# EAGLE board MOSFET_Power_Switch-Panel (EAGLE 9.6.2), part 1 of 2
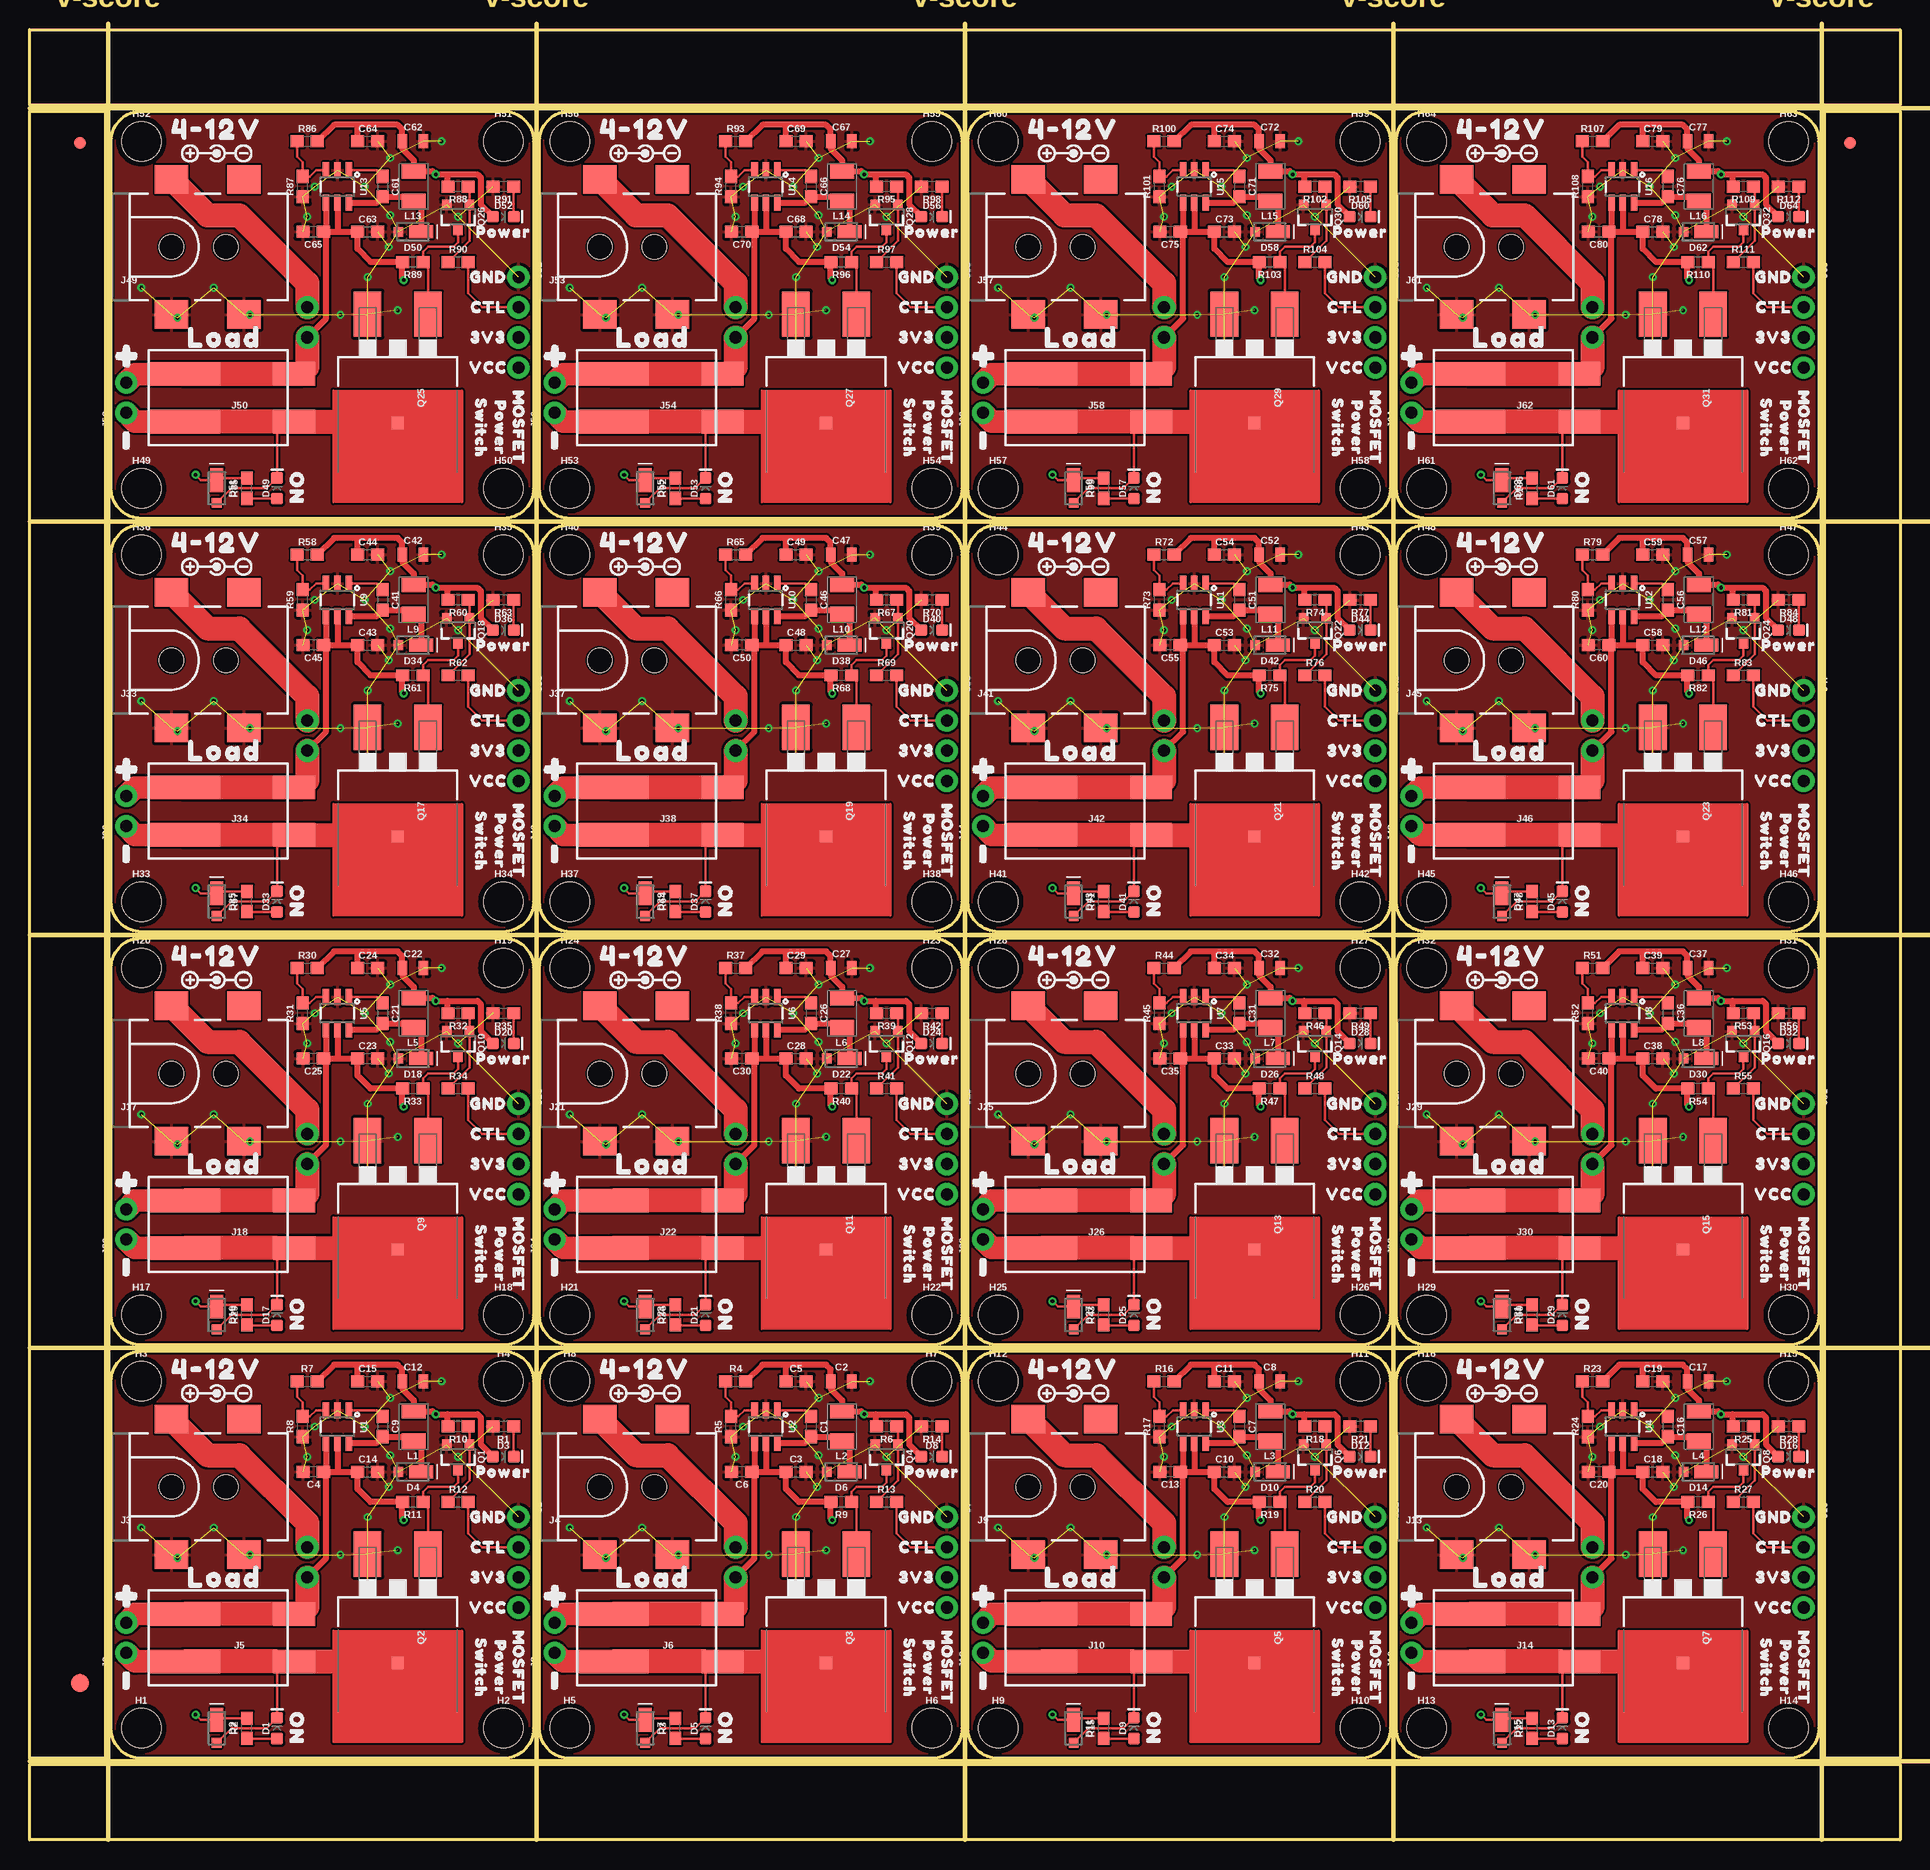
[diagram p0: board, top side]
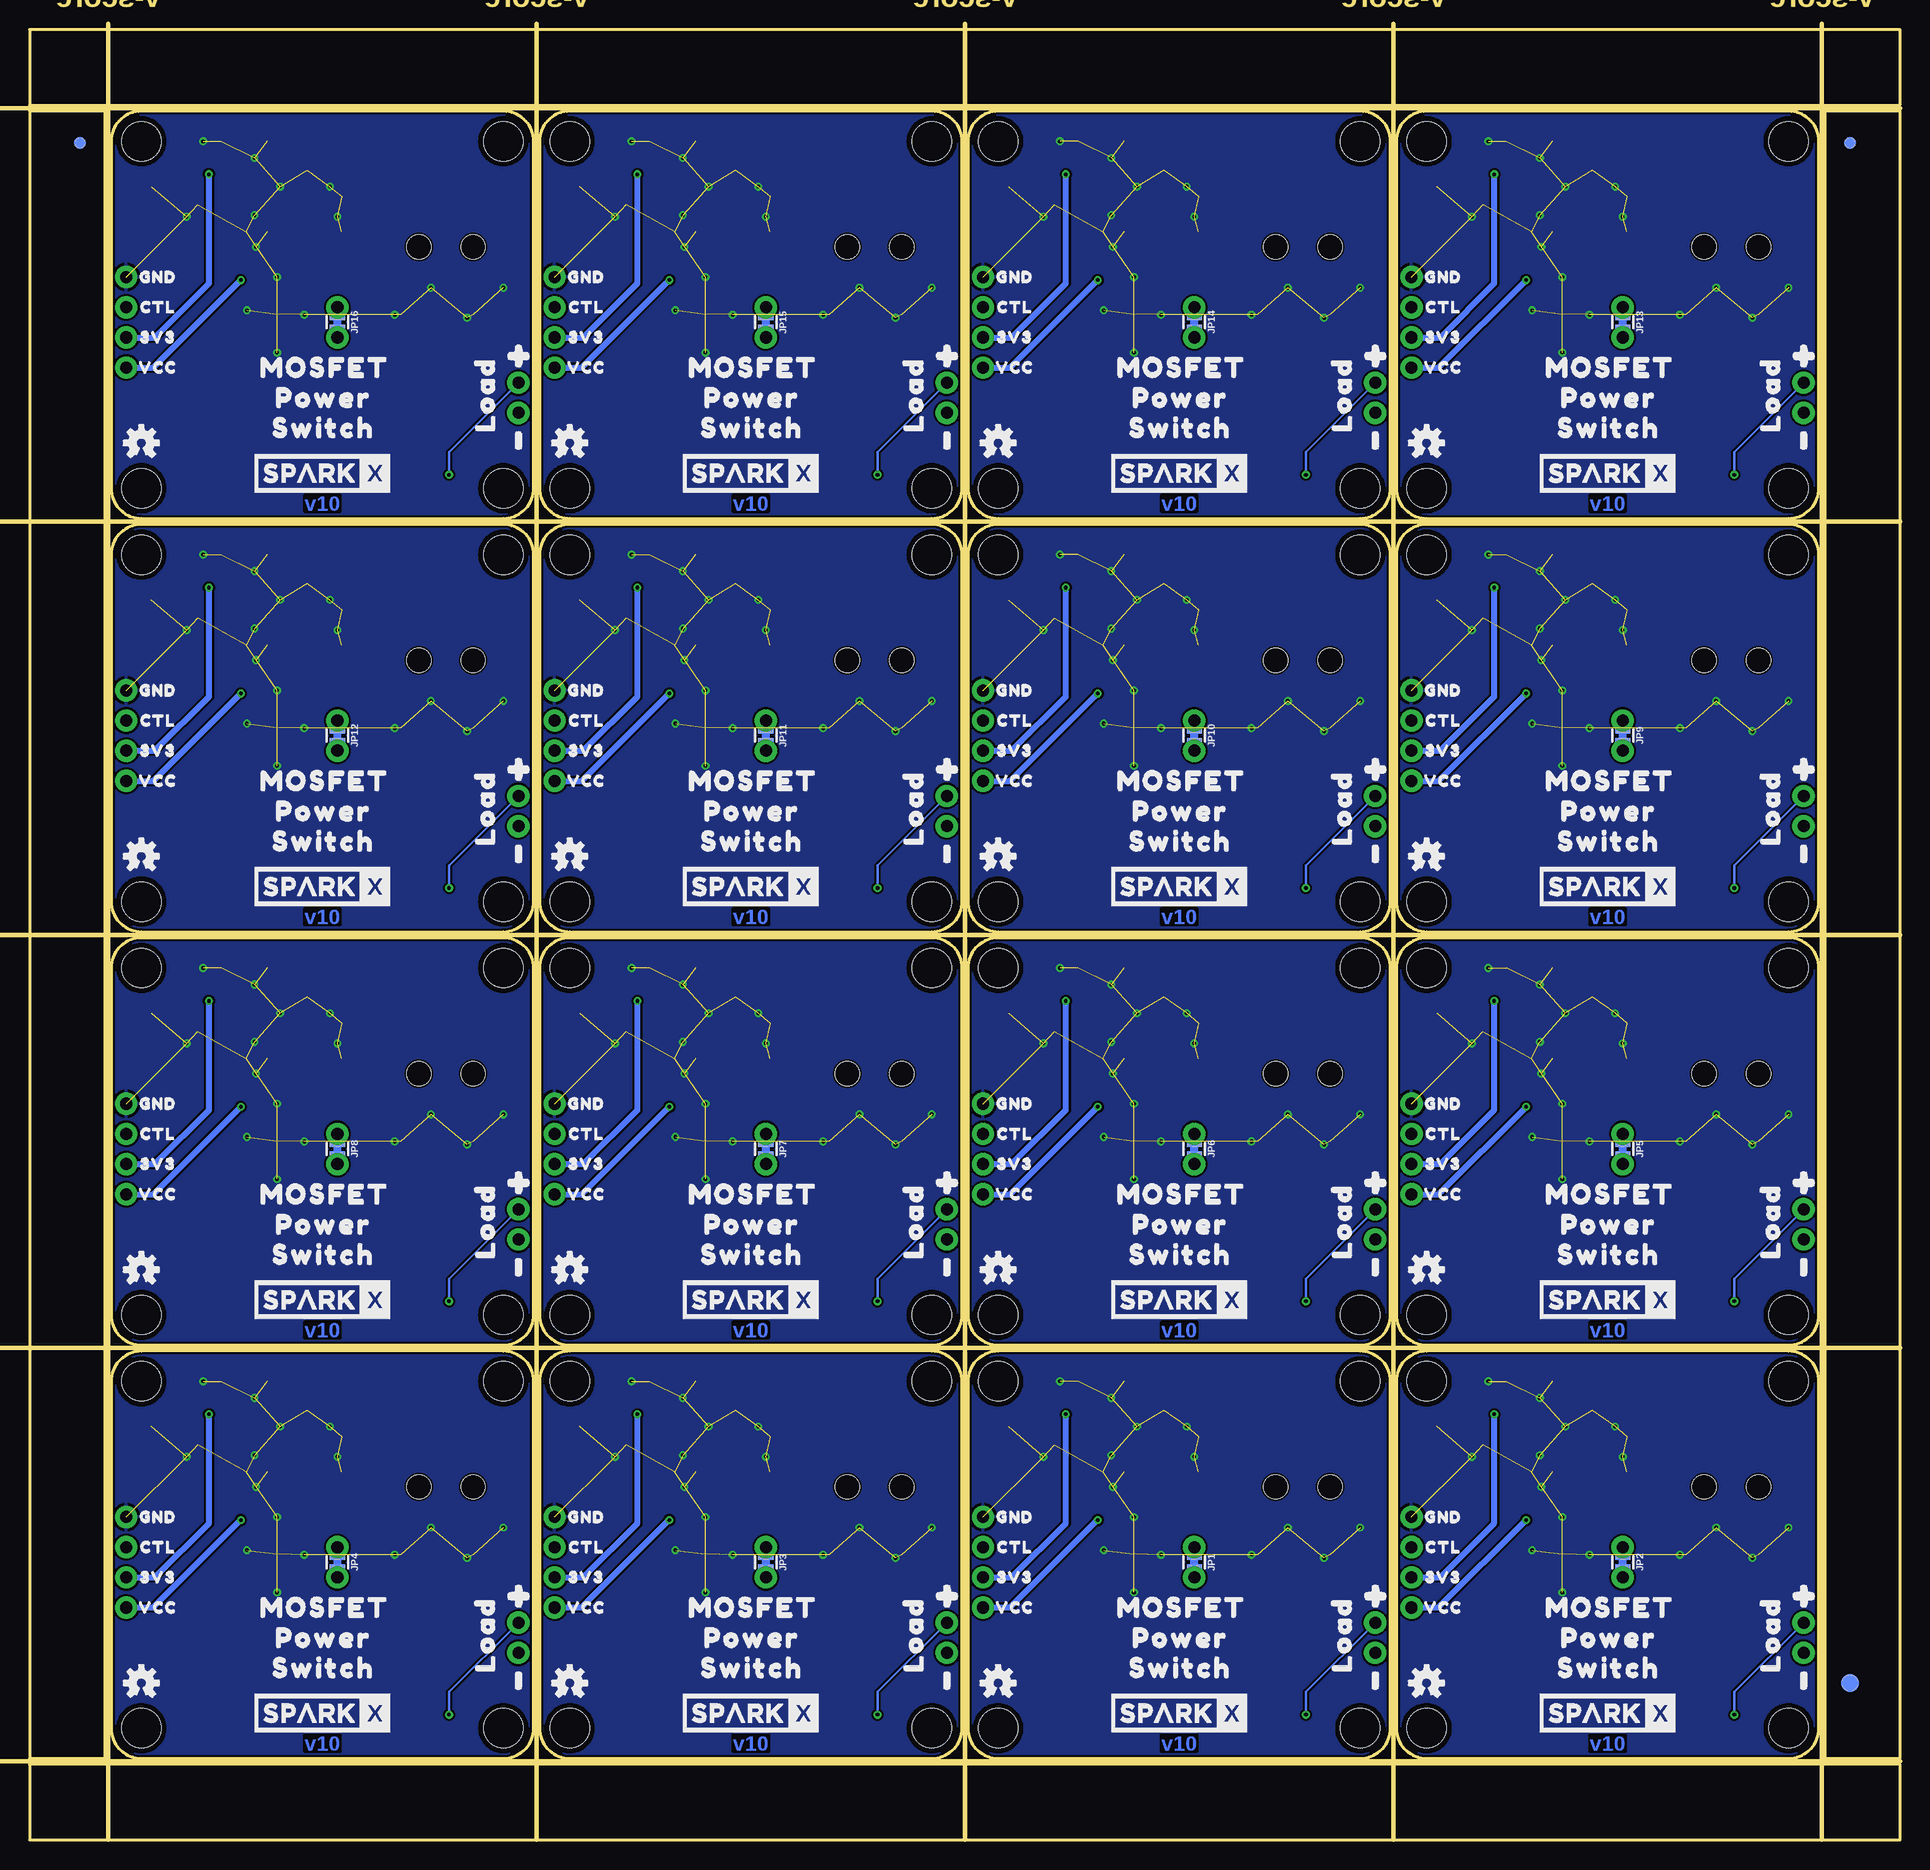
[diagram p1: board, bottom side, seen from below]

Size 157.48 x 152.4 mm. Coordinates in mm from the lower left corner, seen from the top.
Outline: 6.86,9.4 6.86,38.61 arc-90 9.4,41.15 39.88,41.15 arc-90 42.42,38.61 42.42,9.4 arc-90 39.88,6.86 9.4,6.86 arc-90 6.86,9.4
Outline: 42.93,9.4 42.93,38.61 arc-90 45.47,41.15 75.95,41.15 arc-90 78.49,38.61 78.49,9.4 arc-90 75.95,6.86 45.47,6.86 arc-90 42.93,9.4
Outline: 78.99,9.4 78.99,38.61 arc-90 81.53,41.15 112.01,41.15 arc-90 114.55,38.61 114.55,9.4 arc-90 112.01,6.86 81.53,6.86 arc-90 78.99,9.4
Outline: 115.06,9.4 115.06,38.61 arc-90 117.6,41.15 148.08,41.15 arc-90 150.62,38.61 150.62,9.4 arc-90 148.08,6.86 117.6,6.86 arc-90 115.06,9.4
Outline: 6.86,44.2 6.86,73.41 arc-90 9.4,75.95 39.88,75.95 arc-90 42.42,73.41 42.42,44.2 arc-90 39.88,41.66 9.4,41.66 arc-90 6.86,44.2
Outline: 42.93,44.2 42.93,73.41 arc-90 45.47,75.95 75.95,75.95 arc-90 78.49,73.41 78.49,44.2 arc-90 75.95,41.66 45.47,41.66 arc-90 42.93,44.2
Outline: 78.99,44.2 78.99,73.41 arc-90 81.53,75.95 112.01,75.95 arc-90 114.55,73.41 114.55,44.2 arc-90 112.01,41.66 81.53,41.66 arc-90 78.99,44.2
Outline: 115.06,44.2 115.06,73.41 arc-90 117.6,75.95 148.08,75.95 arc-90 150.62,73.41 150.62,44.2 arc-90 148.08,41.66 117.6,41.66 arc-90 115.06,44.2
Outline: 6.86,78.99 6.86,108.2 arc-90 9.4,110.74 39.88,110.74 arc-90 42.42,108.2 42.42,78.99 arc-90 39.88,76.45 9.4,76.45 arc-90 6.86,78.99
Outline: 42.93,78.99 42.93,108.2 arc-90 45.47,110.74 75.95,110.74 arc-90 78.49,108.2 78.49,78.99 arc-90 75.95,76.45 45.47,76.45 arc-90 42.93,78.99
Outline: 78.99,78.99 78.99,108.2 arc-90 81.53,110.74 112.01,110.74 arc-90 114.55,108.2 114.55,78.99 arc-90 112.01,76.45 81.53,76.45 arc-90 78.99,78.99
Outline: 115.06,78.99 115.06,108.2 arc-90 117.6,110.74 148.08,110.74 arc-90 150.62,108.2 150.62,78.99 arc-90 148.08,76.45 117.6,76.45 arc-90 115.06,78.99
Outline: 6.86,113.79 6.86,143 arc-90 9.4,145.54 39.88,145.54 arc-90 42.42,143 42.42,113.79 arc-90 39.88,111.25 9.4,111.25 arc-90 6.86,113.79
Outline: 42.93,113.79 42.93,143 arc-90 45.47,145.54 75.95,145.54 arc-90 78.49,143 78.49,113.79 arc-90 75.95,111.25 45.47,111.25 arc-90 42.93,113.79
Outline: 78.99,113.79 78.99,143 arc-90 81.53,145.54 112.01,145.54 arc-90 114.55,143 114.55,113.79 arc-90 112.01,111.25 81.53,111.25 arc-90 78.99,113.79
Outline: 115.06,113.79 115.06,143 arc-90 117.6,145.54 148.08,145.54 arc-90 150.62,143 150.62,113.79 arc-90 148.08,111.25 117.6,111.25 arc-90 115.06,113.79
Outline: 0,6.35 157.48,6.35 157.48,0 0,0 0,6.35
Outline: 151.13,145.54 157.48,145.54 157.48,6.86 151.13,6.86 151.13,145.54
Outline: 0,152.4 157.48,152.4 157.48,146.05 0,146.05 0,152.4
Outline: 0,145.54 6.35,145.54 6.35,6.86 0,6.86 0,145.54
Copper layers (1*16): Top 0.035mm / dielectric 1.5mm / Bottom 0.035mm
Design rules "MOSFET_Power_Switch": minimum track width 7mil, minimum drill 0.3mm, track to track 7mil, track to pad 7mil, pad to pad 7mil, via to via 7mil, smd to smd 7mil, copper to edge 7mil, drill to drill 7mil, minimum pad ring 7mil, minimum via ring 7mil, stop-mask expansion 3mil, vias tented up to drill 25mil, thermal gap 10mil
Net classes: 1 power: width 0.254 mm
Milling: 10 lines

## Footprints (pad centres in the part's own frame; a part is rotated, then mirrored left to right if it is on the bottom)
0603 = smd 1.1 x 1: 1 -0.85,0; 2 0.85,0
0805 = smd 0.8 x 1.2: 1 -0.9,0; 2 0.9,0
LED-0603 = smd 1 x 1: A -0.877,0; C 0.877,0
DIODE-MICRO-SMP = smd 0.813 x 0.813: A 1.219,0 | smd 2.007 x 1.102: C -0.699,0
FIDUCIAL-1X2 = smd 1 x 1: 1 0,0
FIDUCIAL-1.5X3 = smd 1.5 x 1.5: 1 0,0
STAND-OFF = hole 3.302: 0,0
1X04_NO_SILK = drill 1.016 pad 1.88: 1 0,0; 2 2.54,0; 3 5.08,0; 4 7.62,0
1X02_NO_SILK = drill 1.016 pad 1.88: 1 0,0; 2 2.54,0
POWER_JACK_SMD = smd 2.8 x 2.4: GND 0,-5.7; P$4 6.1,-5.7; VIN0 0,5.7; VIN1 6.1,5.7 | hole 2.032: 0,0; 4.572,0
1X02_POKEHOME = smd 3.5 x 2: P1 5.25,2; P2 5.25,-2 | smd 6 x 2: P3 -4,2; P4 -4,-2
COMBO-JUMPER_2_NC_TRACE = smd 0.635 x 1.27: 1 -0.508,0; 2 0.508,0 | drill 1.016 pad 1.88: 3 -1.27,0; 4 1.27,0
INDUCTOR_LQH32 = smd 2 x 1.25: P$1 -0.07,1.205; P$2 -0.07,-1.295
SOT23-3 = smd 0.8 x 0.9: 1 -0.95,-1; 2 0.95,-1; 3 0,1.1
TO-263/D2PAK = smd 2.32 x 3.81: 1 -2.54,-7.045; 3 2.54,-7.045 | smd 1 x 1: 2 0,2.125
SOT23-6 = smd 0.55 x 1.35: 1 -0.95,-1.375; 2 0,-1.375; 3 0.95,-1.375; 4 0.95,1.375; 5 0,1.375; 6 -0.95,1.375

## Placement (x,y rotation side)
C1  470nF  [0603]  65.79,34.8 270 top
C2  47uF/6.3V  [0805]  68.33,38.61 0 top
C3  0.1uF  [0603]  64.52,30.99 0 top
C4  4.7uF  [0603]  23.88,30.99 180 top
C5  0.1uF  [0603]  64.52,38.61 0 top
C6  4.7uF  [0603]  59.94,30.99 180 top
C7  470nF  [0603]  101.85,34.8 270 top
C8  47uF/6.3V  [0805]  104.39,38.61 0 top
C9  470nF  [0603]  29.72,34.8 270 top
C10  0.1uF  [0603]  100.58,30.99 0 top
C11  0.1uF  [0603]  100.58,38.61 0 top
C12  47uF/6.3V  [0805]  32.26,38.61 0 top
C13  4.7uF  [0603]  96.01,30.99 180 top
C14  0.1uF  [0603]  28.45,30.99 0 top
C15  0.1uF  [0603]  28.45,38.61 0 top
C16  470nF  [0603]  137.92,34.8 270 top
C17  47uF/6.3V  [0805]  140.46,38.61 0 top
C18  0.1uF  [0603]  136.65,30.99 0 top
C19  0.1uF  [0603]  136.65,38.61 0 top
C20  4.7uF  [0603]  132.08,30.99 180 top
C21  470nF  [0603]  29.72,69.6 270 top
C22  47uF/6.3V  [0805]  32.26,73.41 0 top
C23  0.1uF  [0603]  28.45,65.79 0 top
C24  0.1uF  [0603]  28.45,73.41 0 top
C25  4.7uF  [0603]  23.88,65.79 180 top
C26  470nF  [0603]  65.79,69.6 270 top
C27  47uF/6.3V  [0805]  68.33,73.41 0 top
C28  0.1uF  [0603]  64.52,65.79 0 top
C29  0.1uF  [0603]  64.52,73.41 0 top
C30  4.7uF  [0603]  59.94,65.79 180 top
C31  470nF  [0603]  101.85,69.6 270 top
C32  47uF/6.3V  [0805]  104.39,73.41 0 top
C33  0.1uF  [0603]  100.58,65.79 0 top
C34  0.1uF  [0603]  100.58,73.41 0 top
C35  4.7uF  [0603]  96.01,65.79 180 top
C36  470nF  [0603]  137.92,69.6 270 top
C37  47uF/6.3V  [0805]  140.46,73.41 0 top
C38  0.1uF  [0603]  136.65,65.79 0 top
C39  0.1uF  [0603]  136.65,73.41 0 top
C40  4.7uF  [0603]  132.08,65.79 180 top
C41  470nF  [0603]  29.72,104.39 270 top
C42  47uF/6.3V  [0805]  32.26,108.2 0 top
C43  0.1uF  [0603]  28.45,100.58 0 top
C44  0.1uF  [0603]  28.45,108.2 0 top
C45  4.7uF  [0603]  23.88,100.58 180 top
C46  470nF  [0603]  65.79,104.39 270 top
C47  47uF/6.3V  [0805]  68.33,108.2 0 top
C48  0.1uF  [0603]  64.52,100.58 0 top
C49  0.1uF  [0603]  64.52,108.2 0 top
C50  4.7uF  [0603]  59.94,100.58 180 top
C51  470nF  [0603]  101.85,104.39 270 top
C52  47uF/6.3V  [0805]  104.39,108.2 0 top
C53  0.1uF  [0603]  100.58,100.58 0 top
C54  0.1uF  [0603]  100.58,108.2 0 top
C55  4.7uF  [0603]  96.01,100.58 180 top
C56  470nF  [0603]  137.92,104.39 270 top
C57  47uF/6.3V  [0805]  140.46,108.2 0 top
C58  0.1uF  [0603]  136.65,100.58 0 top
C59  0.1uF  [0603]  136.65,108.2 0 top
C60  4.7uF  [0603]  132.08,100.58 180 top
C61  470nF  [0603]  29.72,139.19 270 top
C62  47uF/6.3V  [0805]  32.26,143 0 top
C63  0.1uF  [0603]  28.45,135.38 0 top
C64  0.1uF  [0603]  28.45,143 0 top
C65  4.7uF  [0603]  23.88,135.38 180 top
C66  470nF  [0603]  65.79,139.19 270 top
C67  47uF/6.3V  [0805]  68.33,143 0 top
C68  0.1uF  [0603]  64.52,135.38 0 top
C69  0.1uF  [0603]  64.52,143 0 top
C70  4.7uF  [0603]  59.94,135.38 180 top
C71  470nF  [0603]  101.85,139.19 270 top
C72  47uF/6.3V  [0805]  104.39,143 0 top
C73  0.1uF  [0603]  100.58,135.38 0 top
C74  0.1uF  [0603]  100.58,143 0 top
C75  4.7uF  [0603]  96.01,135.38 180 top
C76  470nF  [0603]  137.92,139.19 270 top
C77  47uF/6.3V  [0805]  140.46,143 0 top
C78  0.1uF  [0603]  136.65,135.38 0 top
C79  0.1uF  [0603]  136.65,143 0 top
C80  4.7uF  [0603]  132.08,135.38 180 top
D1  RED  [LED-0603]  20.83,9.4 90 top
D2  1A/60V/520mV  [DIODE-MICRO-SMP]  15.75,9.4 270 top
D3  RED  [LED-0603]  39.88,32.26 0 top
D4  1A/60V/520mV  [DIODE-MICRO-SMP]  32.26,30.99 180 top
D5  RED  [LED-0603]  56.9,9.4 90 top
D6  1A/60V/520mV  [DIODE-MICRO-SMP]  68.33,30.99 180 top
D7  1A/60V/520mV  [DIODE-MICRO-SMP]  51.82,9.4 270 top
D8  RED  [LED-0603]  75.95,32.26 0 top
D9  RED  [LED-0603]  92.96,9.4 90 top
D10  1A/60V/520mV  [DIODE-MICRO-SMP]  104.39,30.99 180 top
D11  1A/60V/520mV  [DIODE-MICRO-SMP]  87.88,9.4 270 top
D12  RED  [LED-0603]  112.01,32.26 0 top
D13  RED  [LED-0603]  129.03,9.4 90 top
D14  1A/60V/520mV  [DIODE-MICRO-SMP]  140.46,30.99 180 top
D15  1A/60V/520mV  [DIODE-MICRO-SMP]  123.95,9.4 270 top
D16  RED  [LED-0603]  148.08,32.26 0 top
D17  RED  [LED-0603]  20.83,44.2 90 top
D18  1A/60V/520mV  [DIODE-MICRO-SMP]  32.26,65.79 180 top
D19  1A/60V/520mV  [DIODE-MICRO-SMP]  15.75,44.2 270 top
D20  RED  [LED-0603]  39.88,67.06 0 top
D21  RED  [LED-0603]  56.9,44.2 90 top
D22  1A/60V/520mV  [DIODE-MICRO-SMP]  68.33,65.79 180 top
D23  1A/60V/520mV  [DIODE-MICRO-SMP]  51.82,44.2 270 top
D24  RED  [LED-0603]  75.95,67.06 0 top
D25  RED  [LED-0603]  92.96,44.2 90 top
D26  1A/60V/520mV  [DIODE-MICRO-SMP]  104.39,65.79 180 top
D27  1A/60V/520mV  [DIODE-MICRO-SMP]  87.88,44.2 270 top
D28  RED  [LED-0603]  112.01,67.06 0 top
D29  RED  [LED-0603]  129.03,44.2 90 top
D30  1A/60V/520mV  [DIODE-MICRO-SMP]  140.46,65.79 180 top
D31  1A/60V/520mV  [DIODE-MICRO-SMP]  123.95,44.2 270 top
D32  RED  [LED-0603]  148.08,67.06 0 top
D33  RED  [LED-0603]  20.83,78.99 90 top
D34  1A/60V/520mV  [DIODE-MICRO-SMP]  32.26,100.58 180 top
D35  1A/60V/520mV  [DIODE-MICRO-SMP]  15.75,78.99 270 top
D36  RED  [LED-0603]  39.88,101.85 0 top
D37  RED  [LED-0603]  56.9,78.99 90 top
D38  1A/60V/520mV  [DIODE-MICRO-SMP]  68.33,100.58 180 top
D39  1A/60V/520mV  [DIODE-MICRO-SMP]  51.82,78.99 270 top
D40  RED  [LED-0603]  75.95,101.85 0 top
D41  RED  [LED-0603]  92.96,78.99 90 top
D42  1A/60V/520mV  [DIODE-MICRO-SMP]  104.39,100.58 180 top
D43  1A/60V/520mV  [DIODE-MICRO-SMP]  87.88,78.99 270 top
D44  RED  [LED-0603]  112.01,101.85 0 top
D45  RED  [LED-0603]  129.03,78.99 90 top
D46  1A/60V/520mV  [DIODE-MICRO-SMP]  140.46,100.58 180 top
D47  1A/60V/520mV  [DIODE-MICRO-SMP]  123.95,78.99 270 top
D48  RED  [LED-0603]  148.08,101.85 0 top
D49  RED  [LED-0603]  20.83,113.79 90 top
D50  1A/60V/520mV  [DIODE-MICRO-SMP]  32.26,135.38 180 top
D51  1A/60V/520mV  [DIODE-MICRO-SMP]  15.75,113.79 270 top
D52  RED  [LED-0603]  39.88,136.65 0 top
D53  RED  [LED-0603]  56.9,113.79 90 top
D54  1A/60V/520mV  [DIODE-MICRO-SMP]  68.33,135.38 180 top
D55  1A/60V/520mV  [DIODE-MICRO-SMP]  51.82,113.79 270 top
D56  RED  [LED-0603]  75.95,136.65 0 top
D57  RED  [LED-0603]  92.96,113.79 90 top
D58  1A/60V/520mV  [DIODE-MICRO-SMP]  104.39,135.38 180 top
D59  1A/60V/520mV  [DIODE-MICRO-SMP]  87.88,113.79 270 top
D60  RED  [LED-0603]  112.01,136.65 0 top
D61  RED  [LED-0603]  129.03,113.79 90 top
D62  1A/60V/520mV  [DIODE-MICRO-SMP]  140.46,135.38 180 top
D63  1A/60V/520mV  [DIODE-MICRO-SMP]  123.95,113.79 270 top
D64  RED  [LED-0603]  148.08,136.65 0 top
E$1  [FIDUCIAL-1X2]  4.23,142.88 0 top
E$2  [FIDUCIAL-1X2]  4.23,142.88 0 bottom
E$3  [FIDUCIAL-1X2]  153.25,142.88 0 top
E$4  [FIDUCIAL-1X2]  153.25,142.88 0 bottom
E$5  [FIDUCIAL-1.5X3]  4.23,13.21 0 top
E$6  [FIDUCIAL-1.5X3]  4.23,13.21 0 bottom
H1  STAND-OFF  [STAND-OFF]  9.4,9.4 0 top
H2  STAND-OFF  [STAND-OFF]  39.88,9.4 0 top
H3  STAND-OFF  [STAND-OFF]  9.4,38.61 0 top
H4  STAND-OFF  [STAND-OFF]  39.88,38.61 0 top
H5  STAND-OFF  [STAND-OFF]  45.47,9.4 0 top
H6  STAND-OFF  [STAND-OFF]  75.95,9.4 0 top
H7  STAND-OFF  [STAND-OFF]  75.95,38.61 0 top
H8  STAND-OFF  [STAND-OFF]  45.47,38.61 0 top
H9  STAND-OFF  [STAND-OFF]  81.53,9.4 0 top
H10  STAND-OFF  [STAND-OFF]  112.01,9.4 0 top
H11  STAND-OFF  [STAND-OFF]  112.01,38.61 0 top
H12  STAND-OFF  [STAND-OFF]  81.53,38.61 0 top
H13  STAND-OFF  [STAND-OFF]  117.6,9.4 0 top
H14  STAND-OFF  [STAND-OFF]  148.08,9.4 0 top
H15  STAND-OFF  [STAND-OFF]  148.08,38.61 0 top
H16  STAND-OFF  [STAND-OFF]  117.6,38.61 0 top
H17  STAND-OFF  [STAND-OFF]  9.4,44.2 0 top
H18  STAND-OFF  [STAND-OFF]  39.88,44.2 0 top
H19  STAND-OFF  [STAND-OFF]  39.88,73.41 0 top
H20  STAND-OFF  [STAND-OFF]  9.4,73.41 0 top
H21  STAND-OFF  [STAND-OFF]  45.47,44.2 0 top
H22  STAND-OFF  [STAND-OFF]  75.95,44.2 0 top
H23  STAND-OFF  [STAND-OFF]  75.95,73.41 0 top
H24  STAND-OFF  [STAND-OFF]  45.47,73.41 0 top
H25  STAND-OFF  [STAND-OFF]  81.53,44.2 0 top
H26  STAND-OFF  [STAND-OFF]  112.01,44.2 0 top
H27  STAND-OFF  [STAND-OFF]  112.01,73.41 0 top
H28  STAND-OFF  [STAND-OFF]  81.53,73.41 0 top
H29  STAND-OFF  [STAND-OFF]  117.6,44.2 0 top
H30  STAND-OFF  [STAND-OFF]  148.08,44.2 0 top
H31  STAND-OFF  [STAND-OFF]  148.08,73.41 0 top
H32  STAND-OFF  [STAND-OFF]  117.6,73.41 0 top
H33  STAND-OFF  [STAND-OFF]  9.4,78.99 0 top
H34  STAND-OFF  [STAND-OFF]  39.88,78.99 0 top
H35  STAND-OFF  [STAND-OFF]  39.88,108.2 0 top
H36  STAND-OFF  [STAND-OFF]  9.4,108.2 0 top
H37  STAND-OFF  [STAND-OFF]  45.47,78.99 0 top
H38  STAND-OFF  [STAND-OFF]  75.95,78.99 0 top
H39  STAND-OFF  [STAND-OFF]  75.95,108.2 0 top
H40  STAND-OFF  [STAND-OFF]  45.47,108.2 0 top
H41  STAND-OFF  [STAND-OFF]  81.53,78.99 0 top
H42  STAND-OFF  [STAND-OFF]  112.01,78.99 0 top
H43  STAND-OFF  [STAND-OFF]  112.01,108.2 0 top
H44  STAND-OFF  [STAND-OFF]  81.53,108.2 0 top
H45  STAND-OFF  [STAND-OFF]  117.6,78.99 0 top
H46  STAND-OFF  [STAND-OFF]  148.08,78.99 0 top
H47  STAND-OFF  [STAND-OFF]  148.08,108.2 0 top
H48  STAND-OFF  [STAND-OFF]  117.6,108.2 0 top
H49  STAND-OFF  [STAND-OFF]  9.4,113.79 0 top
H50  STAND-OFF  [STAND-OFF]  39.88,113.79 0 top
H51  STAND-OFF  [STAND-OFF]  39.88,143 0 top
H52  STAND-OFF  [STAND-OFF]  9.4,143 0 top
H53  STAND-OFF  [STAND-OFF]  45.47,113.79 0 top
H54  STAND-OFF  [STAND-OFF]  75.95,113.79 0 top
H55  STAND-OFF  [STAND-OFF]  75.95,143 0 top
H56  STAND-OFF  [STAND-OFF]  45.47,143 0 top
H57  STAND-OFF  [STAND-OFF]  81.53,113.79 0 top
H58  STAND-OFF  [STAND-OFF]  112.01,113.79 0 top
H59  STAND-OFF  [STAND-OFF]  112.01,143 0 top
H60  STAND-OFF  [STAND-OFF]  81.53,143 0 top
H61  STAND-OFF  [STAND-OFF]  117.6,113.79 0 top
H62  STAND-OFF  [STAND-OFF]  148.08,113.79 0 top
H63  STAND-OFF  [STAND-OFF]  148.08,143 0 top
H64  STAND-OFF  [STAND-OFF]  117.6,143 0 top
J1  [1X04_NO_SILK]  41.15,27.18 270 top
J2  [1X02_NO_SILK]  8.13,15.75 90 top
J3  5.5x2.1mm Barrel  [POWER_JACK_SMD]  11.94,29.72 0 top
J4  5.5x2.1mm Barrel  [POWER_JACK_SMD]  48.01,29.72 0 top
J5  [1X02_POKEHOME]  17.02,17.02 0 top
J6  [1X02_POKEHOME]  53.09,17.02 0 top
J7  [1X04_NO_SILK]  77.22,27.18 270 top
J8  [1X02_NO_SILK]  44.2,15.75 90 top
J9  5.5x2.1mm Barrel  [POWER_JACK_SMD]  84.07,29.72 0 top
J10  [1X02_POKEHOME]  89.15,17.02 0 top
J11  [1X04_NO_SILK]  113.28,27.18 270 top
J12  [1X02_NO_SILK]  80.26,15.75 90 top
J13  5.5x2.1mm Barrel  [POWER_JACK_SMD]  120.14,29.72 0 top
J14  [1X02_POKEHOME]  125.22,17.02 0 top
J15  [1X04_NO_SILK]  149.35,27.18 270 top
J16  [1X02_NO_SILK]  116.33,15.75 90 top
J17  5.5x2.1mm Barrel  [POWER_JACK_SMD]  11.94,64.52 0 top
J18  [1X02_POKEHOME]  17.02,51.82 0 top
J19  [1X04_NO_SILK]  41.15,61.98 270 top
J20  [1X02_NO_SILK]  8.13,50.55 90 top
J21  5.5x2.1mm Barrel  [POWER_JACK_SMD]  48.01,64.52 0 top
J22  [1X02_POKEHOME]  53.09,51.82 0 top
J23  [1X04_NO_SILK]  77.22,61.98 270 top
J24  [1X02_NO_SILK]  44.2,50.55 90 top
J25  5.5x2.1mm Barrel  [POWER_JACK_SMD]  84.07,64.52 0 top
J26  [1X02_POKEHOME]  89.15,51.82 0 top
J27  [1X04_NO_SILK]  113.28,61.98 270 top
J28  [1X02_NO_SILK]  80.26,50.55 90 top
J29  5.5x2.1mm Barrel  [POWER_JACK_SMD]  120.14,64.52 0 top
J30  [1X02_POKEHOME]  125.22,51.82 0 top
J31  [1X04_NO_SILK]  149.35,61.98 270 top
J32  [1X02_NO_SILK]  116.33,50.55 90 top
J33  5.5x2.1mm Barrel  [POWER_JACK_SMD]  11.94,99.31 0 top
J34  [1X02_POKEHOME]  17.02,86.61 0 top
J35  [1X04_NO_SILK]  41.15,96.77 270 top
J36  [1X02_NO_SILK]  8.13,85.34 90 top
J37  5.5x2.1mm Barrel  [POWER_JACK_SMD]  48.01,99.31 0 top
J38  [1X02_POKEHOME]  53.09,86.61 0 top
J39  [1X04_NO_SILK]  77.22,96.77 270 top
J40  [1X02_NO_SILK]  44.2,85.34 90 top
J41  5.5x2.1mm Barrel  [POWER_JACK_SMD]  84.07,99.31 0 top
J42  [1X02_POKEHOME]  89.15,86.61 0 top
J43  [1X04_NO_SILK]  113.28,96.77 270 top
J44  [1X02_NO_SILK]  80.26,85.34 90 top
J45  5.5x2.1mm Barrel  [POWER_JACK_SMD]  120.14,99.31 0 top
J46  [1X02_POKEHOME]  125.22,86.61 0 top
J47  [1X04_NO_SILK]  149.35,96.77 270 top
J48  [1X02_NO_SILK]  116.33,85.34 90 top
J49  5.5x2.1mm Barrel  [POWER_JACK_SMD]  11.94,134.11 0 top
J50  [1X02_POKEHOME]  17.02,121.41 0 top
J51  [1X04_NO_SILK]  41.15,131.57 270 top
J52  [1X02_NO_SILK]  8.13,120.14 90 top
J53  5.5x2.1mm Barrel  [POWER_JACK_SMD]  48.01,134.11 0 top
J54  [1X02_POKEHOME]  53.09,121.41 0 top
J55  [1X04_NO_SILK]  77.22,131.57 270 top
J56  [1X02_NO_SILK]  44.2,120.14 90 top
J57  5.5x2.1mm Barrel  [POWER_JACK_SMD]  84.07,134.11 0 top
J58  [1X02_POKEHOME]  89.15,121.41 0 top
J59  [1X04_NO_SILK]  113.28,131.57 270 top
J60  [1X02_NO_SILK]  80.26,120.14 90 top
J61  5.5x2.1mm Barrel  [POWER_JACK_SMD]  120.14,134.11 0 top
J62  [1X02_POKEHOME]  125.22,121.41 0 top
J63  [1X04_NO_SILK]  149.35,131.57 270 top
J64  [1X02_NO_SILK]  116.33,120.14 90 top
JP1  JUMPER-COMBO_2_NC_TRACE  [COMBO-JUMPER_2_NC_TRACE]  59.44,23.37 270 bottom
JP2  JUMPER-COMBO_2_NC_TRACE  [COMBO-JUMPER_2_NC_TRACE]  23.37,23.37 270 bottom
JP3  JUMPER-COMBO_2_NC_TRACE  [COMBO-JUMPER_2_NC_TRACE]  95.5,23.37 270 bottom
JP4  JUMPER-COMBO_2_NC_TRACE  [COMBO-JUMPER_2_NC_TRACE]  131.57,23.37 270 bottom
JP5  JUMPER-COMBO_2_NC_TRACE  [COMBO-JUMPER_2_NC_TRACE]  23.37,58.17 270 bottom
JP6  JUMPER-COMBO_2_NC_TRACE  [COMBO-JUMPER_2_NC_TRACE]  59.44,58.17 270 bottom
JP7  JUMPER-COMBO_2_NC_TRACE  [COMBO-JUMPER_2_NC_TRACE]  95.5,58.17 270 bottom
JP8  JUMPER-COMBO_2_NC_TRACE  [COMBO-JUMPER_2_NC_TRACE]  131.57,58.17 270 bottom
JP9  JUMPER-COMBO_2_NC_TRACE  [COMBO-JUMPER_2_NC_TRACE]  23.37,92.96 270 bottom
JP10  JUMPER-COMBO_2_NC_TRACE  [COMBO-JUMPER_2_NC_TRACE]  59.44,92.96 270 bottom
JP11  JUMPER-COMBO_2_NC_TRACE  [COMBO-JUMPER_2_NC_TRACE]  95.5,92.96 270 bottom
JP12  JUMPER-COMBO_2_NC_TRACE  [COMBO-JUMPER_2_NC_TRACE]  131.57,92.96 270 bottom
JP13  JUMPER-COMBO_2_NC_TRACE  [COMBO-JUMPER_2_NC_TRACE]  23.37,127.76 270 bottom
JP14  JUMPER-COMBO_2_NC_TRACE  [COMBO-JUMPER_2_NC_TRACE]  59.44,127.76 270 bottom
JP15  JUMPER-COMBO_2_NC_TRACE  [COMBO-JUMPER_2_NC_TRACE]  95.5,127.76 270 bottom
JP16  JUMPER-COMBO_2_NC_TRACE  [COMBO-JUMPER_2_NC_TRACE]  131.57,127.76 270 bottom
L1  15uH  [INDUCTOR_LQH32]  32.26,34.8 180 top
L2  15uH  [INDUCTOR_LQH32]  68.33,34.8 180 top
L3  15uH  [INDUCTOR_LQH32]  104.39,34.8 180 top
L4  15uH  [INDUCTOR_LQH32]  140.46,34.8 180 top
L5  15uH  [INDUCTOR_LQH32]  32.26,69.6 180 top
L6  15uH  [INDUCTOR_LQH32]  68.33,69.6 180 top
L7  15uH  [INDUCTOR_LQH32]  104.39,69.6 180 top
L8  15uH  [INDUCTOR_LQH32]  140.46,69.6 180 top
L9  15uH  [INDUCTOR_LQH32]  32.26,104.39 180 top
L10  15uH  [INDUCTOR_LQH32]  68.33,104.39 180 top
L11  15uH  [INDUCTOR_LQH32]  104.39,104.39 180 top
L12  15uH  [INDUCTOR_LQH32]  140.46,104.39 180 top
L13  15uH  [INDUCTOR_LQH32]  32.26,139.19 180 top
L14  15uH  [INDUCTOR_LQH32]  68.33,139.19 180 top
L15  15uH  [INDUCTOR_LQH32]  104.39,139.19 180 top
L16  15uH  [INDUCTOR_LQH32]  140.46,139.19 180 top
LOGO1  OSHW-LOGOS  [OSHW-LOGO-S]  39.88,13.21 0 bottom
LOGO2  OSHW-LOGOS  [OSHW-LOGO-S]  75.95,13.21 0 bottom
LOGO3  OSHW-LOGOS  [OSHW-LOGO-S]  112.01,13.21 0 bottom
LOGO4  OSHW-LOGOS  [OSHW-LOGO-S]  148.08,13.21 0 bottom
LOGO5  OSHW-LOGOS  [OSHW-LOGO-S]  39.88,48.01 0 bottom
LOGO6  OSHW-LOGOS  [OSHW-LOGO-S]  75.95,48.01 0 bottom
LOGO7  OSHW-LOGOS  [OSHW-LOGO-S]  112.01,48.01 0 bottom
LOGO8  OSHW-LOGOS  [OSHW-LOGO-S]  148.08,48.01 0 bottom
LOGO9  OSHW-LOGOS  [OSHW-LOGO-S]  39.88,82.8 0 bottom
LOGO10  OSHW-LOGOS  [OSHW-LOGO-S]  75.95,82.8 0 bottom
LOGO11  OSHW-LOGOS  [OSHW-LOGO-S]  112.01,82.8 0 bottom
LOGO12  OSHW-LOGOS  [OSHW-LOGO-S]  148.08,82.8 0 bottom
LOGO13  OSHW-LOGOS  [OSHW-LOGO-S]  39.88,117.6 0 bottom
LOGO14  OSHW-LOGOS  [OSHW-LOGO-S]  75.95,117.6 0 bottom
LOGO15  OSHW-LOGOS  [OSHW-LOGO-S]  112.01,117.6 0 bottom
LOGO16  OSHW-LOGOS  [OSHW-LOGO-S]  148.08,117.6 0 bottom
Q1  600mA/40V  [SOT23-3]  36.07,32.26 180 top
Q2  100A/100V/6.8mΩ  [TO-263/D2PAK]  30.99,17.02 180 top
Q3  100A/100V/6.8mΩ  [TO-263/D2PAK]  67.06,17.02 180 top
Q4  600mA/40V  [SOT23-3]  72.14,32.26 180 top
Q5  100A/100V/6.8mΩ  [TO-263/D2PAK]  103.12,17.02 180 top
Q6  600mA/40V  [SOT23-3]  108.2,32.26 180 top
Q7  100A/100V/6.8mΩ  [TO-263/D2PAK]  139.19,17.02 180 top
Q8  600mA/40V  [SOT23-3]  144.27,32.26 180 top
Q9  100A/100V/6.8mΩ  [TO-263/D2PAK]  30.99,51.82 180 top
Q10  600mA/40V  [SOT23-3]  36.07,67.06 180 top
Q11  100A/100V/6.8mΩ  [TO-263/D2PAK]  67.06,51.82 180 top
Q12  600mA/40V  [SOT23-3]  72.14,67.06 180 top
Q13  100A/100V/6.8mΩ  [TO-263/D2PAK]  103.12,51.82 180 top
Q14  600mA/40V  [SOT23-3]  108.2,67.06 180 top
Q15  100A/100V/6.8mΩ  [TO-263/D2PAK]  139.19,51.82 180 top
Q16  600mA/40V  [SOT23-3]  144.27,67.06 180 top
Q17  100A/100V/6.8mΩ  [TO-263/D2PAK]  30.99,86.61 180 top
Q18  600mA/40V  [SOT23-3]  36.07,101.85 180 top
Q19  100A/100V/6.8mΩ  [TO-263/D2PAK]  67.06,86.61 180 top
Q20  600mA/40V  [SOT23-3]  72.14,101.85 180 top
Q21  100A/100V/6.8mΩ  [TO-263/D2PAK]  103.12,86.61 180 top
Q22  600mA/40V  [SOT23-3]  108.2,101.85 180 top
Q23  100A/100V/6.8mΩ  [TO-263/D2PAK]  139.19,86.61 180 top
Q24  600mA/40V  [SOT23-3]  144.27,101.85 180 top
Q25  100A/100V/6.8mΩ  [TO-263/D2PAK]  30.99,121.41 180 top
Q26  600mA/40V  [SOT23-3]  36.07,136.65 180 top
Q27  100A/100V/6.8mΩ  [TO-263/D2PAK]  67.06,121.41 180 top
Q28  600mA/40V  [SOT23-3]  72.14,136.65 180 top
Q29  100A/100V/6.8mΩ  [TO-263/D2PAK]  103.12,121.41 180 top
Q30  600mA/40V  [SOT23-3]  108.2,136.65 180 top
Q31  100A/100V/6.8mΩ  [TO-263/D2PAK]  139.19,121.41 180 top
Q32  600mA/40V  [SOT23-3]  144.27,136.65 180 top
R1  1k  [0603]  39.88,34.8 180 top
R2  4.7k  [0603]  18.29,9.4 90 top
R3  4.7k  [0603]  54.36,9.4 90 top
R4  3.3k  [0603]  59.44,38.61 0 top
R5  1k  [0603]  59.05,34.8 90 top
R6  10k  [0603]  72.14,34.8 180 top
R7  3.3k  [0603]  23.37,38.61 0 top
R8  1k  [0603]  22.99,34.8 90 top
R9  10k  [0603]  68.33,28.45 180 top
R10  10k  [0603]  36.07,34.8 180 top
R11  10k  [0603]  32.26,28.45 180 top
R12  1k  [0603]  36.07,28.45 0 top
R13  1k  [0603]  72.14,28.45 0 top
R14  1k  [0603]  75.95,34.8 180 top
R15  4.7k  [0603]  90.42,9.4 90 top
R16  3.3k  [0603]  95.5,38.61 0 top
R17  1k  [0603]  95.12,34.8 90 top
R18  10k  [0603]  108.2,34.8 180 top
R19  10k  [0603]  104.39,28.45 180 top
R20  1k  [0603]  108.2,28.45 0 top
R21  1k  [0603]  112.01,34.8 180 top
R22  4.7k  [0603]  126.49,9.4 90 top
R23  3.3k  [0603]  131.57,38.61 0 top
R24  1k  [0603]  131.19,34.8 90 top
R25  10k  [0603]  144.27,34.8 180 top
R26  10k  [0603]  140.46,28.45 180 top
R27  1k  [0603]  144.27,28.45 0 top
R28  1k  [0603]  148.08,34.8 180 top
R29  4.7k  [0603]  18.29,44.2 90 top
R30  3.3k  [0603]  23.37,73.41 0 top
R31  1k  [0603]  22.99,69.6 90 top
R32  10k  [0603]  36.07,69.6 180 top
R33  10k  [0603]  32.26,63.25 180 top
R34  1k  [0603]  36.07,63.25 0 top
R35  1k  [0603]  39.88,69.6 180 top
R36  4.7k  [0603]  54.36,44.2 90 top
R37  3.3k  [0603]  59.44,73.41 0 top
R38  1k  [0603]  59.05,69.6 90 top
R39  10k  [0603]  72.14,69.6 180 top
R40  10k  [0603]  68.33,63.25 180 top
R41  1k  [0603]  72.14,63.25 0 top
R42  1k  [0603]  75.95,69.6 180 top
R43  4.7k  [0603]  90.42,44.2 90 top
R44  3.3k  [0603]  95.5,73.41 0 top
R45  1k  [0603]  95.12,69.6 90 top
R46  10k  [0603]  108.2,69.6 180 top
R47  10k  [0603]  104.39,63.25 180 top
R48  1k  [0603]  108.2,63.25 0 top
R49  1k  [0603]  112.01,69.6 180 top
R50  4.7k  [0603]  126.49,44.2 90 top
R51  3.3k  [0603]  131.57,73.41 0 top
R52  1k  [0603]  131.19,69.6 90 top
R53  10k  [0603]  144.27,69.6 180 top
R54  10k  [0603]  140.46,63.25 180 top
R55  1k  [0603]  144.27,63.25 0 top
R56  1k  [0603]  148.08,69.6 180 top
R57  4.7k  [0603]  18.29,78.99 90 top
R58  3.3k  [0603]  23.37,108.2 0 top
R59  1k  [0603]  22.99,104.39 90 top
R60  10k  [0603]  36.07,104.39 180 top
R61  10k  [0603]  32.26,98.04 180 top
R62  1k  [0603]  36.07,98.04 0 top
R63  1k  [0603]  39.88,104.39 180 top
R64  4.7k  [0603]  54.36,78.99 90 top
R65  3.3k  [0603]  59.44,108.2 0 top
R66  1k  [0603]  59.05,104.39 90 top
R67  10k  [0603]  72.14,104.39 180 top
R68  10k  [0603]  68.33,98.04 180 top
R69  1k  [0603]  72.14,98.04 0 top
R70  1k  [0603]  75.95,104.39 180 top
R71  4.7k  [0603]  90.42,78.99 90 top
R72  3.3k  [0603]  95.5,108.2 0 top
R73  1k  [0603]  95.12,104.39 90 top
R74  10k  [0603]  108.2,104.39 180 top
R75  10k  [0603]  104.39,98.04 180 top
R76  1k  [0603]  108.2,98.04 0 top
R77  1k  [0603]  112.01,104.39 180 top
R78  4.7k  [0603]  126.49,78.99 90 top
R79  3.3k  [0603]  131.57,108.2 0 top
R80  1k  [0603]  131.19,104.39 90 top
R81  10k  [0603]  144.27,104.39 180 top
R82  10k  [0603]  140.46,98.04 180 top
R83  1k  [0603]  144.27,98.04 0 top
R84  1k  [0603]  148.08,104.39 180 top
R85  4.7k  [0603]  18.29,113.79 90 top
R86  3.3k  [0603]  23.37,143 0 top
R87  1k  [0603]  22.99,139.19 90 top
R88  10k  [0603]  36.07,139.19 180 top
R89  10k  [0603]  32.26,132.84 180 top
R90  1k  [0603]  36.07,132.84 0 top
R91  1k  [0603]  39.88,139.19 180 top
R92  4.7k  [0603]  54.36,113.79 90 top
R93  3.3k  [0603]  59.44,143 0 top
R94  1k  [0603]  59.05,139.19 90 top
R95  10k  [0603]  72.14,139.19 180 top
R96  10k  [0603]  68.33,132.84 180 top
R97  1k  [0603]  72.14,132.84 0 top
R98  1k  [0603]  75.95,139.19 180 top
R99  4.7k  [0603]  90.42,113.79 90 top
R100  3.3k  [0603]  95.5,143 0 top
R101  1k  [0603]  95.12,139.19 90 top
R102  10k  [0603]  108.2,139.19 180 top
R103  10k  [0603]  104.39,132.84 180 top
R104  1k  [0603]  108.2,132.84 0 top
R105  1k  [0603]  112.01,139.19 180 top
R106  4.7k  [0603]  126.49,113.79 90 top
R107  3.3k  [0603]  131.57,143 0 top
R108  1k  [0603]  131.19,139.19 90 top
R109  10k  [0603]  144.27,139.19 180 top
R110  10k  [0603]  140.46,132.84 180 top
R111  1k  [0603]  144.27,132.84 0 top
R112  1k  [0603]  148.08,139.19 180 top
U1  LMR14203  [SOT23-6]  25.91,34.8 180 top
U2  LMR14203  [SOT23-6]  61.98,34.8 180 top
U3  LMR14203  [SOT23-6]  98.04,34.8 180 top
U4  LMR14203  [SOT23-6]  134.11,34.8 180 top
U5  LMR14203  [SOT23-6]  25.91,69.6 180 top
U6  LMR14203  [SOT23-6]  61.98,69.6 180 top
U7  LMR14203  [SOT23-6]  98.04,69.6 180 top
U8  LMR14203  [SOT23-6]  134.11,69.6 180 top
U9  LMR14203  [SOT23-6]  25.91,104.39 180 top
U10  LMR14203  [SOT23-6]  61.98,104.39 180 top
U11  LMR14203  [SOT23-6]  98.04,104.39 180 top
U12  LMR14203  [SOT23-6]  134.11,104.39 180 top
U13  LMR14203  [SOT23-6]  25.91,139.19 180 top
U14  LMR14203  [SOT23-6]  61.98,139.19 180 top
U15  LMR14203  [SOT23-6]  98.04,139.19 180 top
U16  LMR14203  [SOT23-6]  134.11,139.19 180 top
U$1  [3V32]  38.61,22.1 0 top
U$2  [MOSFET0]  41.15,14.48 270 top
U$3  [GND0]  38.61,27.18 0 top
U$4  SPARKX-LOGO5  [SPARKX-LARGE]  60.71,10.67 0 bottom
U$5  [LOAD0]  16.38,22.1 0 top
U$6  [4#12V0]  15.75,39.62 0 top
U$7  [VCC3]  38.61,19.56 0 top
U$8  [CTL0]  38.61,24.64 0 top
U$9  [POWER1]  39.62,14.48 270 top
U$10  [#0]  8.13,20.32 270 top
U$11  [#1]  8.13,13.21 270 top
U$12  [ON0]  58.55,9.4 270 top
U$13  [SWITCH2]  37.97,14.48 270 top
U$14  [POLARITY_MARKING_CENTER_POSITIVE#JPG]  51.82,37.59 180 top
U$15  [GND0]  38.48,27.18 0 bottom
U$16  [CTL0]  38.48,24.64 0 bottom
U$17  [3V32]  38.48,22.1 0 bottom
U$18  [VCC3]  38.48,19.56 0 bottom
U$19  [LOAD0]  10.92,17.27 90 bottom
U$20  [#0]  8.13,20.32 270 bottom
U$21  SPARKX-LOGO5  [SPARKX-LARGE]  24.64,10.67 0 bottom
U$22  [#1]  8.13,13.21 270 bottom
U$23  [POWER0]  39.88,30.99 0 top
U$24  [MOSFET_0]  24.13,19.56 0 bottom
U$25  [POWER_1]  24.26,17.02 0 bottom
U$26  [SWITCH_2]  24.26,14.48 0 bottom
U$27  [#0]  44.2,20.32 270 top
U$28  [#1]  44.2,13.21 270 top
U$29  [POLARITY_MARKING_CENTER_POSITIVE#JPG]  15.75,37.59 180 top
U$30  [LOAD0]  52.45,22.1 0 top
U$31  [3V32]  74.68,22.1 0 top
U$32  [GND0]  74.68,27.18 0 top
U$33  [VCC3]  74.68,19.56 0 top
U$34  [CTL0]  74.68,24.64 0 top
U$35  [4#12V0]  51.82,39.62 0 top
U$36  [GND0]  74.55,27.18 0 bottom
U$37  [CTL0]  74.55,24.64 0 bottom
U$38  [3V32]  74.55,22.1 0 bottom
U$39  [VCC3]  74.55,19.56 0 bottom
U$40  [LOAD0]  46.99,17.27 90 bottom
U$41  [#0]  44.2,20.32 270 bottom
U$42  [#1]  44.2,13.21 270 bottom
U$43  [MOSFET0]  77.22,14.48 270 top
U$44  [POWER1]  75.69,14.48 270 top
U$45  [SWITCH2]  74.04,14.48 270 top
U$46  [POWER0]  75.95,30.99 0 top
U$47  [MOSFET_0]  60.2,19.56 0 bottom
U$48  [POWER_1]  60.32,17.02 0 bottom
U$49  [ON0]  22.48,9.4 270 top
U$50  [SWITCH_2]  60.32,14.48 0 bottom
U$51  SPARKX-LOGO5  [SPARKX-LARGE]  96.77,10.67 0 bottom
U$52  [ON0]  94.62,9.4 270 top
U$53  [POLARITY_MARKING_CENTER_POSITIVE#JPG]  87.88,37.59 180 top
U$54  [#0]  80.26,20.32 270 top
U$55  [#1]  80.26,13.21 270 top
U$56  [LOAD0]  88.52,22.1 0 top
U$57  [3V32]  110.74,22.1 0 top
U$58  [GND0]  110.74,27.18 0 top
U$59  [VCC3]  110.74,19.56 0 top
U$60  [CTL0]  110.74,24.64 0 top
U$61  [4#12V0]  87.88,39.62 0 top
U$62  [GND0]  110.62,27.18 0 bottom
U$63  [CTL0]  110.62,24.64 0 bottom
U$64  [3V32]  110.62,22.1 0 bottom
U$65  [VCC3]  110.62,19.56 0 bottom
U$66  [LOAD0]  83.06,17.27 90 bottom
U$67  [#0]  80.26,20.32 270 bottom
U$68  [#1]  80.26,13.21 270 bottom
U$69  [MOSFET0]  113.28,14.48 270 top
U$70  [POWER1]  111.76,14.48 270 top
U$71  [SWITCH2]  110.11,14.48 270 top
U$72  [POWER0]  112.01,30.99 0 top
U$73  [MOSFET_0]  96.27,19.56 0 bottom
U$74  [POWER_1]  96.39,17.02 0 bottom
U$75  [SWITCH_2]  96.39,14.48 0 bottom
U$76  SPARKX-LOGO5  [SPARKX-LARGE]  132.84,10.67 0 bottom
U$77  [ON0]  130.68,9.4 270 top
U$78  [POLARITY_MARKING_CENTER_POSITIVE#JPG]  123.95,37.59 180 top
U$79  [#0]  116.33,20.32 270 top
U$80  [#1]  116.33,13.21 270 top
U$81  [LOAD0]  124.59,22.1 0 top
U$82  [3V32]  146.81,22.1 0 top
U$83  [GND0]  146.81,27.18 0 top
U$84  [VCC3]  146.81,19.56 0 top
U$85  [CTL0]  146.81,24.64 0 top
U$86  [4#12V0]  123.95,39.62 0 top
U$87  [GND0]  146.69,27.18 0 bottom
U$88  [CTL0]  146.69,24.64 0 bottom
U$89  [3V32]  146.69,22.1 0 bottom
U$90  [VCC3]  146.69,19.56 0 bottom
U$91  [LOAD0]  119.13,17.27 90 bottom
U$92  [#0]  116.33,20.32 270 bottom
U$93  [#1]  116.33,13.21 270 bottom
U$94  [MOSFET0]  149.35,14.48 270 top
U$95  [POWER1]  147.83,14.48 270 top
U$96  [SWITCH2]  146.18,14.48 270 top
U$97  [POWER0]  148.08,30.99 0 top
U$98  [MOSFET_0]  132.33,19.56 0 bottom
U$99  [POWER_1]  132.46,17.02 0 bottom
U$100  [SWITCH_2]  132.46,14.48 0 bottom
U$101  SPARKX-LOGO5  [SPARKX-LARGE]  24.64,45.47 0 bottom
U$102  [ON0]  22.48,44.2 270 top
U$103  [POLARITY_MARKING_CENTER_POSITIVE#JPG]  15.75,72.39 180 top
U$104  [#0]  8.13,55.12 270 top
U$105  [#1]  8.13,48.01 270 top
U$106  [LOAD0]  16.38,56.9 0 top
U$107  [3V32]  38.61,56.9 0 top
U$108  [GND0]  38.61,61.98 0 top
U$109  [VCC3]  38.61,54.36 0 top
U$110  [CTL0]  38.61,59.44 0 top
U$111  [4#12V0]  15.75,74.42 0 top
U$112  [GND0]  38.48,61.98 0 bottom
U$113  [CTL0]  38.48,59.44 0 bottom
U$114  [3V32]  38.48,56.9 0 bottom
U$115  [VCC3]  38.48,54.36 0 bottom
U$116  [LOAD0]  10.92,52.07 90 bottom
U$117  [#0]  8.13,55.12 270 bottom
U$118  [#1]  8.13,48.01 270 bottom
U$119  [MOSFET0]  41.15,49.28 270 top
U$120  [POWER1]  39.62,49.28 270 top
U$121  [SWITCH2]  37.97,49.28 270 top
U$122  [POWER0]  39.88,65.79 0 top
U$123  [MOSFET_0]  24.13,54.36 0 bottom
U$124  [POWER_1]  24.26,51.82 0 bottom
U$125  [SWITCH_2]  24.26,49.28 0 bottom
U$126  SPARKX-LOGO5  [SPARKX-LARGE]  60.71,45.47 0 bottom
U$127  [ON0]  58.55,44.2 270 top
U$128  [POLARITY_MARKING_CENTER_POSITIVE#JPG]  51.82,72.39 180 top
U$129  [#0]  44.2,55.12 270 top
U$130  [#1]  44.2,48.01 270 top
U$131  [LOAD0]  52.45,56.9 0 top
U$132  [3V32]  74.68,56.9 0 top
U$133  [GND0]  74.68,61.98 0 top
U$134  [VCC3]  74.68,54.36 0 top
U$135  [CTL0]  74.68,59.44 0 top
U$136  [4#12V0]  51.82,74.42 0 top
U$137  [GND0]  74.55,61.98 0 bottom
U$138  [CTL0]  74.55,59.44 0 bottom
U$139  [3V32]  74.55,56.9 0 bottom
U$140  [VCC3]  74.55,54.36 0 bottom
U$141  [LOAD0]  46.99,52.07 90 bottom
U$142  [#0]  44.2,55.12 270 bottom
U$143  [#1]  44.2,48.01 270 bottom
U$144  [MOSFET0]  77.22,49.28 270 top
U$145  [POWER1]  75.69,49.28 270 top
U$146  [SWITCH2]  74.04,49.28 270 top
U$147  [POWER0]  75.95,65.79 0 top
U$148  [MOSFET_0]  60.2,54.36 0 bottom
U$149  [POWER_1]  60.32,51.82 0 bottom
U$150  [SWITCH_2]  60.32,49.28 0 bottom
U$151  SPARKX-LOGO5  [SPARKX-LARGE]  96.77,45.47 0 bottom
U$152  [ON0]  94.62,44.2 270 top
U$153  [POLARITY_MARKING_CENTER_POSITIVE#JPG]  87.88,72.39 180 top
U$154  [#0]  80.26,55.12 270 top
U$155  [#1]  80.26,48.01 270 top
U$156  [LOAD0]  88.52,56.9 0 top
U$157  [3V32]  110.74,56.9 0 top
U$158  [GND0]  110.74,61.98 0 top
U$159  [VCC3]  110.74,54.36 0 top
U$160  [CTL0]  110.74,59.44 0 top
U$161  [4#12V0]  87.88,74.42 0 top
U$162  [GND0]  110.62,61.98 0 bottom
U$163  [CTL0]  110.62,59.44 0 bottom
U$164  [3V32]  110.62,56.9 0 bottom
U$165  [VCC3]  110.62,54.36 0 bottom
U$166  [LOAD0]  83.06,52.07 90 bottom
U$167  [#0]  80.26,55.12 270 bottom
U$168  [#1]  80.26,48.01 270 bottom
U$169  [MOSFET0]  113.28,49.28 270 top
U$170  [POWER1]  111.76,49.28 270 top
U$171  [SWITCH2]  110.11,49.28 270 top
U$172  [POWER0]  112.01,65.79 0 top
U$173  [MOSFET_0]  96.27,54.36 0 bottom
U$174  [POWER_1]  96.39,51.82 0 bottom
U$175  [SWITCH_2]  96.39,49.28 0 bottom
U$176  SPARKX-LOGO5  [SPARKX-LARGE]  132.84,45.47 0 bottom
U$177  [ON0]  130.68,44.2 270 top
U$178  [POLARITY_MARKING_CENTER_POSITIVE#JPG]  123.95,72.39 180 top
U$179  [#0]  116.33,55.12 270 top
U$180  [#1]  116.33,48.01 270 top
U$181  [LOAD0]  124.59,56.9 0 top
U$182  [3V32]  146.81,56.9 0 top
U$183  [GND0]  146.81,61.98 0 top
U$184  [VCC3]  146.81,54.36 0 top
U$185  [CTL0]  146.81,59.44 0 top
U$186  [4#12V0]  123.95,74.42 0 top
U$187  [GND0]  146.69,61.98 0 bottom
U$188  [CTL0]  146.69,59.44 0 bottom
U$189  [3V32]  146.69,56.9 0 bottom
U$190  [VCC3]  146.69,54.36 0 bottom
U$191  [LOAD0]  119.13,52.07 90 bottom
U$192  [#0]  116.33,55.12 270 bottom
U$193  [#1]  116.33,48.01 270 bottom
U$194  [MOSFET0]  149.35,49.28 270 top
U$195  [POWER1]  147.83,49.28 270 top
U$196  [SWITCH2]  146.18,49.28 270 top
U$197  [POWER0]  148.08,65.79 0 top
U$198  [MOSFET_0]  132.33,54.36 0 bottom
U$199  [POWER_1]  132.46,51.82 0 bottom
U$200  [SWITCH_2]  132.46,49.28 0 bottom
U$201  SPARKX-LOGO5  [SPARKX-LARGE]  24.64,80.26 0 bottom
U$202  [ON0]  22.48,78.99 270 top
U$203  [POLARITY_MARKING_CENTER_POSITIVE#JPG]  15.75,107.19 180 top
U$204  [#0]  8.13,89.92 270 top
U$205  [#1]  8.13,82.8 270 top
U$206  [LOAD0]  16.38,91.69 0 top
U$207  [3V32]  38.61,91.69 0 top
U$208  [GND0]  38.61,96.77 0 top
U$209  [VCC3]  38.61,89.15 0 top
U$210  [CTL0]  38.61,94.23 0 top
U$211  [4#12V0]  15.75,109.22 0 top
U$212  [GND0]  38.48,96.77 0 bottom
U$213  [CTL0]  38.48,94.23 0 bottom
U$214  [3V32]  38.48,91.69 0 bottom
U$215  [VCC3]  38.48,89.15 0 bottom
U$216  [LOAD0]  10.92,86.87 90 bottom
U$217  [#0]  8.13,89.92 270 bottom
U$218  [#1]  8.13,82.8 270 bottom
U$219  [MOSFET0]  41.15,84.07 270 top
U$220  [POWER1]  39.62,84.07 270 top
U$221  [SWITCH2]  37.97,84.07 270 top
U$222  [POWER0]  39.88,100.58 0 top
U$223  [MOSFET_0]  24.13,89.15 0 bottom
U$224  [POWER_1]  24.26,86.61 0 bottom
U$225  [SWITCH_2]  24.26,84.07 0 bottom
U$226  SPARKX-LOGO5  [SPARKX-LARGE]  60.71,80.26 0 bottom
U$227  [ON0]  58.55,78.99 270 top
U$228  [POLARITY_MARKING_CENTER_POSITIVE#JPG]  51.82,107.19 180 top
U$229  [#0]  44.2,89.92 270 top
U$230  [#1]  44.2,82.8 270 top
U$231  [LOAD0]  52.45,91.69 0 top
U$232  [3V32]  74.68,91.69 0 top
U$233  [GND0]  74.68,96.77 0 top
U$234  [VCC3]  74.68,89.15 0 top
U$235  [CTL0]  74.68,94.23 0 top
U$236  [4#12V0]  51.82,109.22 0 top
U$237  [GND0]  74.55,96.77 0 bottom
U$238  [CTL0]  74.55,94.23 0 bottom
U$239  [3V32]  74.55,91.69 0 bottom
U$240  [VCC3]  74.55,89.15 0 bottom
U$241  [LOAD0]  46.99,86.87 90 bottom
U$242  [#0]  44.2,89.92 270 bottom
U$243  [#1]  44.2,82.8 270 bottom
U$244  [MOSFET0]  77.22,84.07 270 top
U$245  [POWER1]  75.69,84.07 270 top
U$246  [SWITCH2]  74.04,84.07 270 top
U$247  [POWER0]  75.95,100.58 0 top
U$248  [MOSFET_0]  60.2,89.15 0 bottom
U$249  [POWER_1]  60.32,86.61 0 bottom
U$250  [SWITCH_2]  60.32,84.07 0 bottom
U$251  SPARKX-LOGO5  [SPARKX-LARGE]  96.77,80.26 0 bottom
U$252  [ON0]  94.62,78.99 270 top
U$253  [POLARITY_MARKING_CENTER_POSITIVE#JPG]  87.88,107.19 180 top
U$254  [#0]  80.26,89.92 270 top
U$255  [#1]  80.26,82.8 270 top
U$256  [LOAD0]  88.52,91.69 0 top
U$257  [3V32]  110.74,91.69 0 top
U$258  [GND0]  110.74,96.77 0 top
U$259  [VCC3]  110.74,89.15 0 top
U$260  [CTL0]  110.74,94.23 0 top
U$261  [4#12V0]  87.88,109.22 0 top
U$262  [GND0]  110.62,96.77 0 bottom
U$263  [CTL0]  110.62,94.23 0 bottom
U$264  [3V32]  110.62,91.69 0 bottom
U$265  [VCC3]  110.62,89.15 0 bottom
U$266  [LOAD0]  83.06,86.87 90 bottom
U$267  [#0]  80.26,89.92 270 bottom
U$268  [#1]  80.26,82.8 270 bottom
U$269  [MOSFET0]  113.28,84.07 270 top
U$270  [POWER1]  111.76,84.07 270 top
U$271  [SWITCH2]  110.11,84.07 270 top
U$272  [POWER0]  112.01,100.58 0 top
U$273  [MOSFET_0]  96.27,89.15 0 bottom
U$274  [POWER_1]  96.39,86.61 0 bottom
U$275  [SWITCH_2]  96.39,84.07 0 bottom
U$276  SPARKX-LOGO5  [SPARKX-LARGE]  132.84,80.26 0 bottom
U$277  [ON0]  130.68,78.99 270 top
U$278  [POLARITY_MARKING_CENTER_POSITIVE#JPG]  123.95,107.19 180 top
U$279  [#0]  116.33,89.92 270 top
U$280  [#1]  116.33,82.8 270 top
U$281  [LOAD0]  124.59,91.69 0 top
U$282  [3V32]  146.81,91.69 0 top
U$283  [GND0]  146.81,96.77 0 top
U$284  [VCC3]  146.81,89.15 0 top
U$285  [CTL0]  146.81,94.23 0 top
U$286  [4#12V0]  123.95,109.22 0 top
U$287  [GND0]  146.69,96.77 0 bottom
U$288  [CTL0]  146.69,94.23 0 bottom
U$289  [3V32]  146.69,91.69 0 bottom
U$290  [VCC3]  146.69,89.15 0 bottom
U$291  [LOAD0]  119.13,86.87 90 bottom
U$292  [#0]  116.33,89.92 270 bottom
U$293  [#1]  116.33,82.8 270 bottom
U$294  [MOSFET0]  149.35,84.07 270 top
U$295  [POWER1]  147.83,84.07 270 top
U$296  [SWITCH2]  146.18,84.07 270 top
U$297  [POWER0]  148.08,100.58 0 top
U$298  [MOSFET_0]  132.33,89.15 0 bottom
U$299  [POWER_1]  132.46,86.61 0 bottom
U$300  [SWITCH_2]  132.46,84.07 0 bottom
U$301  SPARKX-LOGO5  [SPARKX-LARGE]  24.64,115.06 0 bottom
U$302  [ON0]  22.48,113.79 270 top
U$303  [POLARITY_MARKING_CENTER_POSITIVE#JPG]  15.75,141.99 180 top
U$304  [#0]  8.13,124.71 270 top
U$305  [#1]  8.13,117.6 270 top
U$306  [LOAD0]  16.38,126.49 0 top
U$307  [3V32]  38.61,126.49 0 top
U$308  [GND0]  38.61,131.57 0 top
U$309  [VCC3]  38.61,123.95 0 top
U$310  [CTL0]  38.61,129.03 0 top
U$311  [4#12V0]  15.75,144.02 0 top
U$312  [GND0]  38.48,131.57 0 bottom
U$313  [CTL0]  38.48,129.03 0 bottom
U$314  [3V32]  38.48,126.49 0 bottom
U$315  [VCC3]  38.48,123.95 0 bottom
U$316  [LOAD0]  10.92,121.67 90 bottom
U$317  [#0]  8.13,124.71 270 bottom
U$318  [#1]  8.13,117.6 270 bottom
U$319  [MOSFET0]  41.15,118.87 270 top
U$320  [POWER1]  39.62,118.87 270 top
U$321  [SWITCH2]  37.97,118.87 270 top
U$322  [POWER0]  39.88,135.38 0 top
U$323  [MOSFET_0]  24.13,123.95 0 bottom
U$324  [POWER_1]  24.26,121.41 0 bottom
U$325  [SWITCH_2]  24.26,118.87 0 bottom
U$326  SPARKX-LOGO5  [SPARKX-LARGE]  60.71,115.06 0 bottom
U$327  [ON0]  58.55,113.79 270 top
U$328  [POLARITY_MARKING_CENTER_POSITIVE#JPG]  51.82,141.99 180 top
U$329  [#0]  44.2,124.71 270 top
U$330  [#1]  44.2,117.6 270 top
U$331  [LOAD0]  52.45,126.49 0 top
U$332  [3V32]  74.68,126.49 0 top
U$333  [GND0]  74.68,131.57 0 top
U$334  [VCC3]  74.68,123.95 0 top
U$335  [CTL0]  74.68,129.03 0 top
U$336  [4#12V0]  51.82,144.02 0 top
U$337  [GND0]  74.55,131.57 0 bottom
U$338  [CTL0]  74.55,129.03 0 bottom
U$339  [3V32]  74.55,126.49 0 bottom
U$340  [VCC3]  74.55,123.95 0 bottom
U$341  [LOAD0]  46.99,121.67 90 bottom
U$342  [#0]  44.2,124.71 270 bottom
U$343  [#1]  44.2,117.6 270 bottom
U$344  [MOSFET0]  77.22,118.87 270 top
U$345  [POWER1]  75.69,118.87 270 top
U$346  [SWITCH2]  74.04,118.87 270 top
U$347  [POWER0]  75.95,135.38 0 top
U$348  [MOSFET_0]  60.2,123.95 0 bottom
U$349  [POWER_1]  60.32,121.41 0 bottom
U$350  [SWITCH_2]  60.32,118.87 0 bottom
U$351  SPARKX-LOGO5  [SPARKX-LARGE]  96.77,115.06 0 bottom
U$352  [ON0]  94.62,113.79 270 top
U$353  [POLARITY_MARKING_CENTER_POSITIVE#JPG]  87.88,141.99 180 top
U$354  [#0]  80.26,124.71 270 top
U$355  [#1]  80.26,117.6 270 top
U$356  [LOAD0]  88.52,126.49 0 top
U$357  [3V32]  110.74,126.49 0 top
U$358  [GND0]  110.74,131.57 0 top
U$359  [VCC3]  110.74,123.95 0 top
U$360  [CTL0]  110.74,129.03 0 top
U$361  [4#12V0]  87.88,144.02 0 top
U$362  [GND0]  110.62,131.57 0 bottom
U$363  [CTL0]  110.62,129.03 0 bottom
U$364  [3V32]  110.62,126.49 0 bottom
U$365  [VCC3]  110.62,123.95 0 bottom
U$366  [LOAD0]  83.06,121.67 90 bottom
U$367  [#0]  80.26,124.71 270 bottom
U$368  [#1]  80.26,117.6 270 bottom
U$369  [MOSFET0]  113.28,118.87 270 top
U$370  [POWER1]  111.76,118.87 270 top
U$371  [SWITCH2]  110.11,118.87 270 top
U$372  [POWER0]  112.01,135.38 0 top
U$373  [MOSFET_0]  96.27,123.95 0 bottom
U$374  [POWER_1]  96.39,121.41 0 bottom
U$375  [SWITCH_2]  96.39,118.87 0 bottom
U$376  SPARKX-LOGO5  [SPARKX-LARGE]  132.84,115.06 0 bottom
U$377  [ON0]  130.68,113.79 270 top
U$378  [POLARITY_MARKING_CENTER_POSITIVE#JPG]  123.95,141.99 180 top
U$379  [#0]  116.33,124.71 270 top
U$380  [#1]  116.33,117.6 270 top
U$381  [LOAD0]  124.59,126.49 0 top
U$382  [3V32]  146.81,126.49 0 top
U$383  [GND0]  146.81,131.57 0 top
U$384  [VCC3]  146.81,123.95 0 top
U$385  [CTL0]  146.81,129.03 0 top
U$386  [4#12V0]  123.95,144.02 0 top
U$387  [GND0]  146.69,131.57 0 bottom
U$388  [CTL0]  146.69,129.03 0 bottom
U$389  [3V32]  146.69,126.49 0 bottom
U$390  [VCC3]  146.69,123.95 0 bottom
U$391  [LOAD0]  119.13,121.67 90 bottom
U$392  [#0]  116.33,124.71 270 bottom
U$393  [#1]  116.33,117.6 270 bottom
U$394  [MOSFET0]  149.35,118.87 270 top
U$395  [POWER1]  147.83,118.87 270 top
U$396  [SWITCH2]  146.18,118.87 270 top
U$397  [POWER0]  148.08,135.38 0 top
U$398  [MOSFET_0]  132.33,123.95 0 bottom
U$399  [POWER_1]  132.46,121.41 0 bottom
U$400  [SWITCH_2]  132.46,118.87 0 bottom

## Library data of the parts
C1 C7 C9 C16 C21 C26 C31 C36 C41 C46 C51 C56 C61 C66 C71 C76 = SparkFun-Capacitors; PROD_ID: CAP-13216
C2 C8 C12 C17 C22 C27 C32 C37 C42 C47 C52 C57 C62 C67 C72 C77 = SparkFun-Capacitors; PROD_ID: CAP-13854
C3 C10 C14 C18 C23 C28 C33 C38 C43 C48 C53 C58 C63 C68 C73 C78 = SparkFun-Capacitors; PROD_ID: CAP-08390
C4 C6 C13 C20 C25 C30 C35 C40 C45 C50 C55 C60 C65 C70 C75 C80 = SparkFun-Capacitors; PROD_ID: CAP-14106
C5 C11 C15 C19 C24 C29 C34 C39 C44 C49 C54 C59 C64 C69 C74 C79 = SparkFun-Capacitors; PROD_ID: CAP-00810
D1 D3 D5 D8 D9 D12 D13 D16 D17 D20 D21 D24 D25 D28 D29 D32 D33 D36 D37 D40 D41 D44 D45 D48 D49 D52 D53 D56 D57 D60 D61 D64 = SparkFun-LED; PROD_ID: DIO-00819
D2 D4 D6 D7 D10 D11 D14 D15 D18 D19 D22 D23 D26 D27 D30 D31 D34 D35 D38 D39 D42 D43 D46 D47 D50 D51 D54 D55 D58 D59 D62 D63 = SparkFun-DiscreteSemi; PROD_ID: DIO-13919
E$1-E$4 LOGO1-LOGO16 = SparkFun-Aesthetics
E$5 E$6 = SparkFun-Retired
H1-H64 = SparkFun-Hardware
J1 J2 J7 J8 J11 J12 J15 J16 J19 J20 J23 J24 J27 J28 J31 J32 J35 J36 J39 J40 J43 J44 J47 J48 J51 J52 J55 J56 J59 J60 J63 J64 = SparkFun-Connectors
J3 J4 J9 J13 J17 J21 J25 J29 J33 J37 J41 J45 J49 J53 J57 J61 = SparkFun-Connectors; PROD_ID: CONN-08106; SF_ID: PRT-12748
J5 J6 J10 J14 J18 J22 J26 J30 J34 J38 J42 J46 J50 J54 J58 J62 = SparkFun-Connectors; PROD_ID: CONN-13512
JP1-JP16 = SparkFun-Jumpers
L1-L16 = SparkFun-Coils; PROD_ID: NDUC-14107
Q1 Q4 Q6 Q8 Q10 Q12 Q14 Q16 Q18 Q20 Q22 Q24 Q26 Q28 Q30 Q32 = SparkFun-DiscreteSemi; PROD_ID: TRANS-08049
Q2 Q3 Q5 Q7 Q9 Q11 Q13 Q15 Q17 Q19 Q21 Q23 Q25 Q27 Q29 Q31 = SparkFun-DiscreteSemi; PROD_ID: TRANS-12437
R1 R5 R8 R12-R14 R17 R20 R21 R24 R27 R28 R31 R34 R35 R38 R41 R42 R45 R48 R49 R52 R55 R56 R59 R62 R63 R66 R69 R70 R73 R76 R77 R80 R83 R84 R87 R90 R91 R94 R97 R98 R101 R104 R105 R108 R111 R112 = SparkFun-Resistors; PROD_ID: RES-07856
R2 R3 R15 R22 R29 R36 R43 R50 R57 R64 R71 R78 R85 R92 R99 R106 = SparkFun-Resistors; PROD_ID: RES-07857
R4 R7 R16 R23 R30 R37 R44 R51 R58 R65 R72 R79 R86 R93 R100 R107 = SparkFun-Resistors; PROD_ID: RES-07851
R6 R9-R11 R18 R19 R25 R26 R32 R33 R39 R40 R46 R47 R53 R54 R60 R61 R67 R68 R74 R75 R81 R82 R88 R89 R95 R96 R102 R103 R109 R110 = SparkFun-Resistors; PROD_ID: RES-00824
U1-U16 = SparkFun-IC-Power; PROD_ID: IC-13918
U$1-U$3 U$5-U$13 U$15-U$20 U$22-U$28 U$30-U$50 U$52 U$54-U$75 U$77 U$79-U$100 U$102 U$104-U$125 U$127 U$129-U$150 U$152 U$154-U$175 U$177 U$179-U$200 U$202 U$204-U$225 U$227 U$229-U$250 U$252 U$254-U$275 U$277 U$279-U$300 U$302 U$304-U$325 U$327 U$329-U$350 U$352 U$354-U$375 U$377 U$379-U$400 = output
U$4 U$21 U$51 U$76 U$101 U$126 U$151 U$176 U$201 U$226 U$251 U$276 U$301 U$326 U$351 U$376 = SparkX
U$14 U$29 U$53 U$78 U$103 U$128 U$153 U$178 U$203 U$228 U$253 U$278 U$303 U$328 U$353 U$378 = Polarity_marking_center_positive#jpg

## Nets
3.3V: C12.1 C15.1 D3.A J1.3 L1.P$2 R7.2 R10.2
3.3V1: C2.1 C5.1 D8.A J7.3 L2.P$2 R4.2 R6.2
3.3V2: C8.1 C11.1 D12.A J11.3 L3.P$2 R16.2 R18.2
3.3V3: C17.1 C19.1 D16.A J15.3 L4.P$2 R23.2 R25.2
3.3V4: C22.1 C24.1 D20.A J19.3 L5.P$2 R30.2 R32.2
3.3V5: C27.1 C29.1 D24.A J23.3 L6.P$2 R37.2 R39.2
3.3V6: C32.1 C34.1 D28.A J27.3 L7.P$2 R44.2 R46.2
3.3V7: C37.1 C39.1 D32.A J31.3 L8.P$2 R51.2 R53.2
3.3V8: C42.1 C44.1 D36.A J35.3 L9.P$2 R58.2 R60.2
3.3V9: C47.1 C49.1 D40.A J39.3 L10.P$2 R65.2 R67.2
3.3V10: C52.1 C54.1 D44.A J43.3 L11.P$2 R72.2 R74.2
3.3V11: C57.1 C59.1 D48.A J47.3 L12.P$2 R79.2 R81.2
3.3V12: C62.1 C64.1 D52.A J51.3 L13.P$2 R86.2 R88.2
3.3V13: C67.1 C69.1 D56.A J55.3 L14.P$2 R93.2 R95.2
3.3V14: C72.1 C74.1 D60.A J59.3 L15.P$2 R100.2 R102.2
3.3V15: C77.1 C79.1 D64.A J63.3 L16.P$2 R107.2 R109.2
CUTOFF: J1.2 R12.2
CUTOFF1: J7.2 R13.2
CUTOFF2: J11.2 R20.2
CUTOFF3: J15.2 R27.2
CUTOFF4: J19.2 R34.2
CUTOFF5: J23.2 R41.2
CUTOFF6: J27.2 R48.2
CUTOFF7: J31.2 R55.2
CUTOFF8: J35.2 R62.2
CUTOFF9: J39.2 R69.2
CUTOFF10: J43.2 R76.2
CUTOFF11: J47.2 R83.2
CUTOFF12: J51.2 R90.2
CUTOFF13: J55.2 R97.2
CUTOFF14: J59.2 R104.2
CUTOFF15: J63.2 R111.2
GND [power]: C4.2 C12.2 C14.2 C15.2 D4.A J1.1 J3.GND J3.P$4 Q1.2 Q2.3 R1.2 R8.1 U1.2
GND1 [power]: C2.2 C3.2 C5.2 C6.2 D6.A J4.GND J4.P$4 J7.1 Q3.3 Q4.2 R5.1 R14.2 U2.2
GND2 [power]: C8.2 C10.2 C11.2 C13.2 D10.A J9.GND J9.P$4 J11.1 Q5.3 Q6.2 R17.1 R21.2 U3.2
GND3 [power]: C17.2 C18.2 C19.2 C20.2 D14.A J13.GND J13.P$4 J15.1 Q7.3 Q8.2 R24.1 R28.2 U4.2
GND4 [power]: C22.2 C23.2 C24.2 C25.2 D18.A J17.GND J17.P$4 J19.1 Q9.3 Q10.2 R31.1 R35.2 U5.2
GND5 [power]: C27.2 C28.2 C29.2 C30.2 D22.A J21.GND J21.P$4 J23.1 Q11.3 Q12.2 R38.1 R42.2 U6.2
GND6 [power]: C32.2 C33.2 C34.2 C35.2 D26.A J25.GND J25.P$4 J27.1 Q13.3 Q14.2 R45.1 R49.2 U7.2
GND7 [power]: C37.2 C38.2 C39.2 C40.2 D30.A J29.GND J29.P$4 J31.1 Q15.3 Q16.2 R52.1 R56.2 U8.2
GND8 [power]: C42.2 C43.2 C44.2 C45.2 D34.A J33.GND J33.P$4 J35.1 Q17.3 Q18.2 R59.1 R63.2 U9.2
GND9 [power]: C47.2 C48.2 C49.2 C50.2 D38.A J37.GND J37.P$4 J39.1 Q19.3 Q20.2 R66.1 R70.2 U10.2
GND10 [power]: C52.2 C53.2 C54.2 C55.2 D42.A J41.GND J41.P$4 J43.1 Q21.3 Q22.2 R73.1 R77.2 U11.2
GND11 [power]: C57.2 C58.2 C59.2 C60.2 D46.A J45.GND J45.P$4 J47.1 Q23.3 Q24.2 R80.1 R84.2 U12.2
GND12 [power]: C62.2 C63.2 C64.2 C65.2 D50.A J49.GND J49.P$4 J51.1 Q25.3 Q26.2 R87.1 R91.2 U13.2
GND13 [power]: C67.2 C68.2 C69.2 C70.2 D54.A J53.GND J53.P$4 J55.1 Q27.3 Q28.2 R94.1 R98.2 U14.2
GND14 [power]: C72.2 C73.2 C74.2 C75.2 D58.A J57.GND J57.P$4 J59.1 Q29.3 Q30.2 R101.1 R105.2 U15.2
GND15 [power]: C77.2 C78.2 C79.2 C80.2 D62.A J61.GND J61.P$4 J63.1 Q31.3 Q32.2 R108.1 R112.2 U16.2
N$1: Q1.3 Q2.1 R11.1
N$2: D1.A R2.1
N$3: D3.C R1.1
N$4: D5.A R3.1
N$5: R7.1 R8.2 U1.3
N$6: R4.1 R5.2 U2.3
N$7: C1.1 U2.1
N$8: Q3.1 Q4.3 R9.1
N$9: Q4.1 R6.1 R13.1
N$10: C9.1 U1.1
N$11: D8.C R14.1
N$12: Q1.1 R10.1 R12.1
N$13: D9.A R15.1
N$14: R16.1 R17.2 U3.3
N$15: C7.1 U3.1
N$16: Q5.1 Q6.3 R19.1
N$17: Q6.1 R18.1 R20.1
N$18: D12.C R21.1
N$19: D13.A R22.1
N$20: R23.1 R24.2 U4.3
N$21: C16.1 U4.1
N$22: Q7.1 Q8.3 R26.1
N$23: Q8.1 R25.1 R27.1
N$24: D16.C R28.1
N$25: D17.A R29.1
N$26: R30.1 R31.2 U5.3
N$27: C21.1 U5.1
N$28: Q9.1 Q10.3 R33.1
N$29: Q10.1 R32.1 R34.1
N$30: D20.C R35.1
N$31: D21.A R36.1
N$32: R37.1 R38.2 U6.3
N$33: C26.1 U6.1
N$34: Q11.1 Q12.3 R40.1
N$35: Q12.1 R39.1 R41.1
N$36: D24.C R42.1
N$37: D25.A R43.1
N$38: R44.1 R45.2 U7.3
N$39: C31.1 U7.1
N$40: Q13.1 Q14.3 R47.1
N$41: Q14.1 R46.1 R48.1
N$42: D28.C R49.1
N$43: D29.A R50.1
N$44: R51.1 R52.2 U8.3
N$45: C36.1 U8.1
N$46: Q15.1 Q16.3 R54.1
N$47: Q16.1 R53.1 R55.1
N$48: D32.C R56.1
N$49: D33.A R57.1
N$50: R58.1 R59.2 U9.3
N$51: C41.1 U9.1
N$52: Q17.1 Q18.3 R61.1
N$53: Q18.1 R60.1 R62.1
N$54: D36.C R63.1
N$55: D37.A R64.1
N$56: R65.1 R66.2 U10.3
N$57: C46.1 U10.1
N$58: Q19.1 Q20.3 R68.1
N$59: Q20.1 R67.1 R69.1
N$60: D40.C R70.1
N$61: D41.A R71.1
N$62: R72.1 R73.2 U11.3
N$63: C51.1 U11.1
N$64: Q21.1 Q22.3 R75.1
N$65: Q22.1 R74.1 R76.1
N$66: D44.C R77.1
N$67: D45.A R78.1
N$68: R79.1 R80.2 U12.3
N$69: C56.1 U12.1
N$70: Q23.1 Q24.3 R82.1
N$71: Q24.1 R81.1 R83.1
N$72: D48.C R84.1
N$73: D49.A R85.1
N$74: R86.1 R87.2 U13.3
N$75: C61.1 U13.1
N$76: Q25.1 Q26.3 R89.1
N$77: Q26.1 R88.1 R90.1
N$78: D52.C R91.1
N$79: D53.A R92.1
N$80: R93.1 R94.2 U14.3
N$81: C66.1 U14.1
N$82: Q27.1 Q28.3 R96.1
N$83: Q28.1 R95.1 R97.1
N$84: D56.C R98.1
N$85: D57.A R99.1
N$86: R100.1 R101.2 U15.3
N$87: C71.1 U15.1
N$88: Q29.1 Q30.3 R103.1
N$89: Q30.1 R102.1 R104.1
N$90: D60.C R105.1
N$91: D61.A R106.1
N$92: R107.1 R108.2 U16.3
N$93: C76.1 U16.1
N$94: Q31.1 Q32.3 R110.1
N$95: Q32.1 R109.1 R111.1
N$96: D64.C R112.1
SOLENOID: D1.C D2.A J2.1 J5.P2 J5.P4 Q2.2
SOLENOID1: D5.C D7.A J6.P2 J6.P4 J8.1 Q3.2
SOLENOID2: D9.C D11.A J10.P2 J10.P4 J12.1 Q5.2
SOLENOID3: D13.C D15.A J14.P2 J14.P4 J16.1 Q7.2
SOLENOID4: D17.C D19.A J18.P2 J18.P4 J20.1 Q9.2
SOLENOID5: D21.C D23.A J22.P2 J22.P4 J24.1 Q11.2
SOLENOID6: D25.C D27.A J26.P2 J26.P4 J28.1 Q13.2
SOLENOID7: D29.C D31.A J30.P2 J30.P4 J32.1 Q15.2
SOLENOID8: D33.C D35.A J34.P2 J34.P4 J36.1 Q17.2
SOLENOID9: D37.C D39.A J38.P2 J38.P4 J40.1 Q19.2
SOLENOID10: D41.C D43.A J42.P2 J42.P4 J44.1 Q21.2
SOLENOID11: D45.C D47.A J46.P2 J46.P4 J48.1 Q23.2
SOLENOID12: D49.C D51.A J50.P2 J50.P4 J52.1 Q25.2
SOLENOID13: D53.C D55.A J54.P2 J54.P4 J56.1 Q27.2
SOLENOID14: D57.C D59.A J58.P2 J58.P4 J60.1 Q29.2
SOLENOID15: D61.C D63.A J62.P2 J62.P4 J64.1 Q31.2
VCC: C4.1 C14.1 D2.C J1.4 J2.2 J5.P1 J5.P3 JP2.2 JP2.4 R2.2 R11.2 U1.4 U1.5
VCC1: C3.1 C6.1 D7.C J6.P1 J6.P3 J7.4 J8.2 JP1.2 JP1.4 R3.2 R9.2 U2.4 U2.5
VCC2: C10.1 C13.1 D11.C J10.P1 J10.P3 J11.4 J12.2 JP3.2 JP3.4 R15.2 R19.2 U3.4 U3.5
VCC3: C18.1 C20.1 D15.C J14.P1 J14.P3 J15.4 J16.2 JP4.2 JP4.4 R22.2 R26.2 U4.4 U4.5
VCC4: C23.1 C25.1 D19.C J18.P1 J18.P3 J19.4 J20.2 JP5.2 JP5.4 R29.2 R33.2 U5.4 U5.5
VCC5: C28.1 C30.1 D23.C J22.P1 J22.P3 J23.4 J24.2 JP6.2 JP6.4 R36.2 R40.2 U6.4 U6.5
VCC6: C33.1 C35.1 D27.C J26.P1 J26.P3 J27.4 J28.2 JP7.2 JP7.4 R43.2 R47.2 U7.4 U7.5
VCC7: C38.1 C40.1 D31.C J30.P1 J30.P3 J31.4 J32.2 JP8.2 JP8.4 R50.2 R54.2 U8.4 U8.5
VCC8: C43.1 C45.1 D35.C J34.P1 J34.P3 J35.4 J36.2 JP9.2 JP9.4 R57.2 R61.2 U9.4 U9.5
VCC9: C48.1 C50.1 D39.C J38.P1 J38.P3 J39.4 J40.2 JP10.2 JP10.4 R64.2 R68.2 U10.4 U10.5
VCC10: C53.1 C55.1 D43.C J42.P1 J42.P3 J43.4 J44.2 JP11.2 JP11.4 R71.2 R75.2 U11.4 U11.5
VCC11: C58.1 C60.1 D47.C J46.P1 J46.P3 J47.4 J48.2 JP12.2 JP12.4 R78.2 R82.2 U12.4 U12.5
VCC12: C63.1 C65.1 D51.C J50.P1 J50.P3 J51.4 J52.2 JP13.2 JP13.4 R85.2 R89.2 U13.4 U13.5
VCC13: C68.1 C70.1 D55.C J54.P1 J54.P3 J55.4 J56.2 JP14.2 JP14.4 R92.2 R96.2 U14.4 U14.5
VCC14: C73.1 C75.1 D59.C J58.P1 J58.P3 J59.4 J60.2 JP15.2 JP15.4 R99.2 R103.2 U15.4 U15.5
VCC15: C78.1 C80.1 D63.C J62.P1 J62.P3 J63.4 J64.2 JP16.2 JP16.4 R106.2 R110.2 U16.4 U16.5
VIN: J3.VIN0 JP2.1 JP2.3
VIN1: J4.VIN0 JP1.1 JP1.3
VIN2: J9.VIN0 JP3.1 JP3.3
VIN3: J13.VIN0 JP4.1 JP4.3
VIN4: J17.VIN0 JP5.1 JP5.3
VIN5: J21.VIN0 JP6.1 JP6.3
VIN6: J25.VIN0 JP7.1 JP7.3
VIN7: J29.VIN0 JP8.1 JP8.3
VIN8: J33.VIN0 JP9.1 JP9.3
VIN9: J37.VIN0 JP10.1 JP10.3
VIN10: J41.VIN0 JP11.1 JP11.3
VIN11: J45.VIN0 JP12.1 JP12.3
VIN12: J49.VIN0 JP13.1 JP13.3
VIN13: J53.VIN0 JP14.1 JP14.3
VIN14: J57.VIN0 JP15.1 JP15.3
VIN15: J61.VIN0 JP16.1 JP16.3
VSW: C9.2 D4.C L1.P$1 U1.6
VSW1: C1.2 D6.C L2.P$1 U2.6
VSW2: C7.2 D10.C L3.P$1 U3.6
VSW3: C16.2 D14.C L4.P$1 U4.6
VSW4: C21.2 D18.C L5.P$1 U5.6
VSW5: C26.2 D22.C L6.P$1 U6.6
VSW6: C31.2 D26.C L7.P$1 U7.6
VSW7: C36.2 D30.C L8.P$1 U8.6
VSW8: C41.2 D34.C L9.P$1 U9.6
VSW9: C46.2 D38.C L10.P$1 U10.6
VSW10: C51.2 D42.C L11.P$1 U11.6
VSW11: C56.2 D46.C L12.P$1 U12.6
VSW12: C61.2 D50.C L13.P$1 U13.6
VSW13: C66.2 D54.C L14.P$1 U14.6
VSW14: C71.2 D58.C L15.P$1 U15.6
VSW15: C76.2 D62.C L16.P$1 U16.6